# Altium PCB Cube_Brain_PCB.PcbDoc
Units mm, origin at the board's own origin, x right, y up, seen from the top; angles counter-clockwise.
Board outline 34.2 x 34.2 mm, 4 copper layers (Top Layer, Layer 2, Layer 3, Bottom Layer), stack 1.005 mm thick; 92 components, 78 nets, 284 pads, 205 vias.
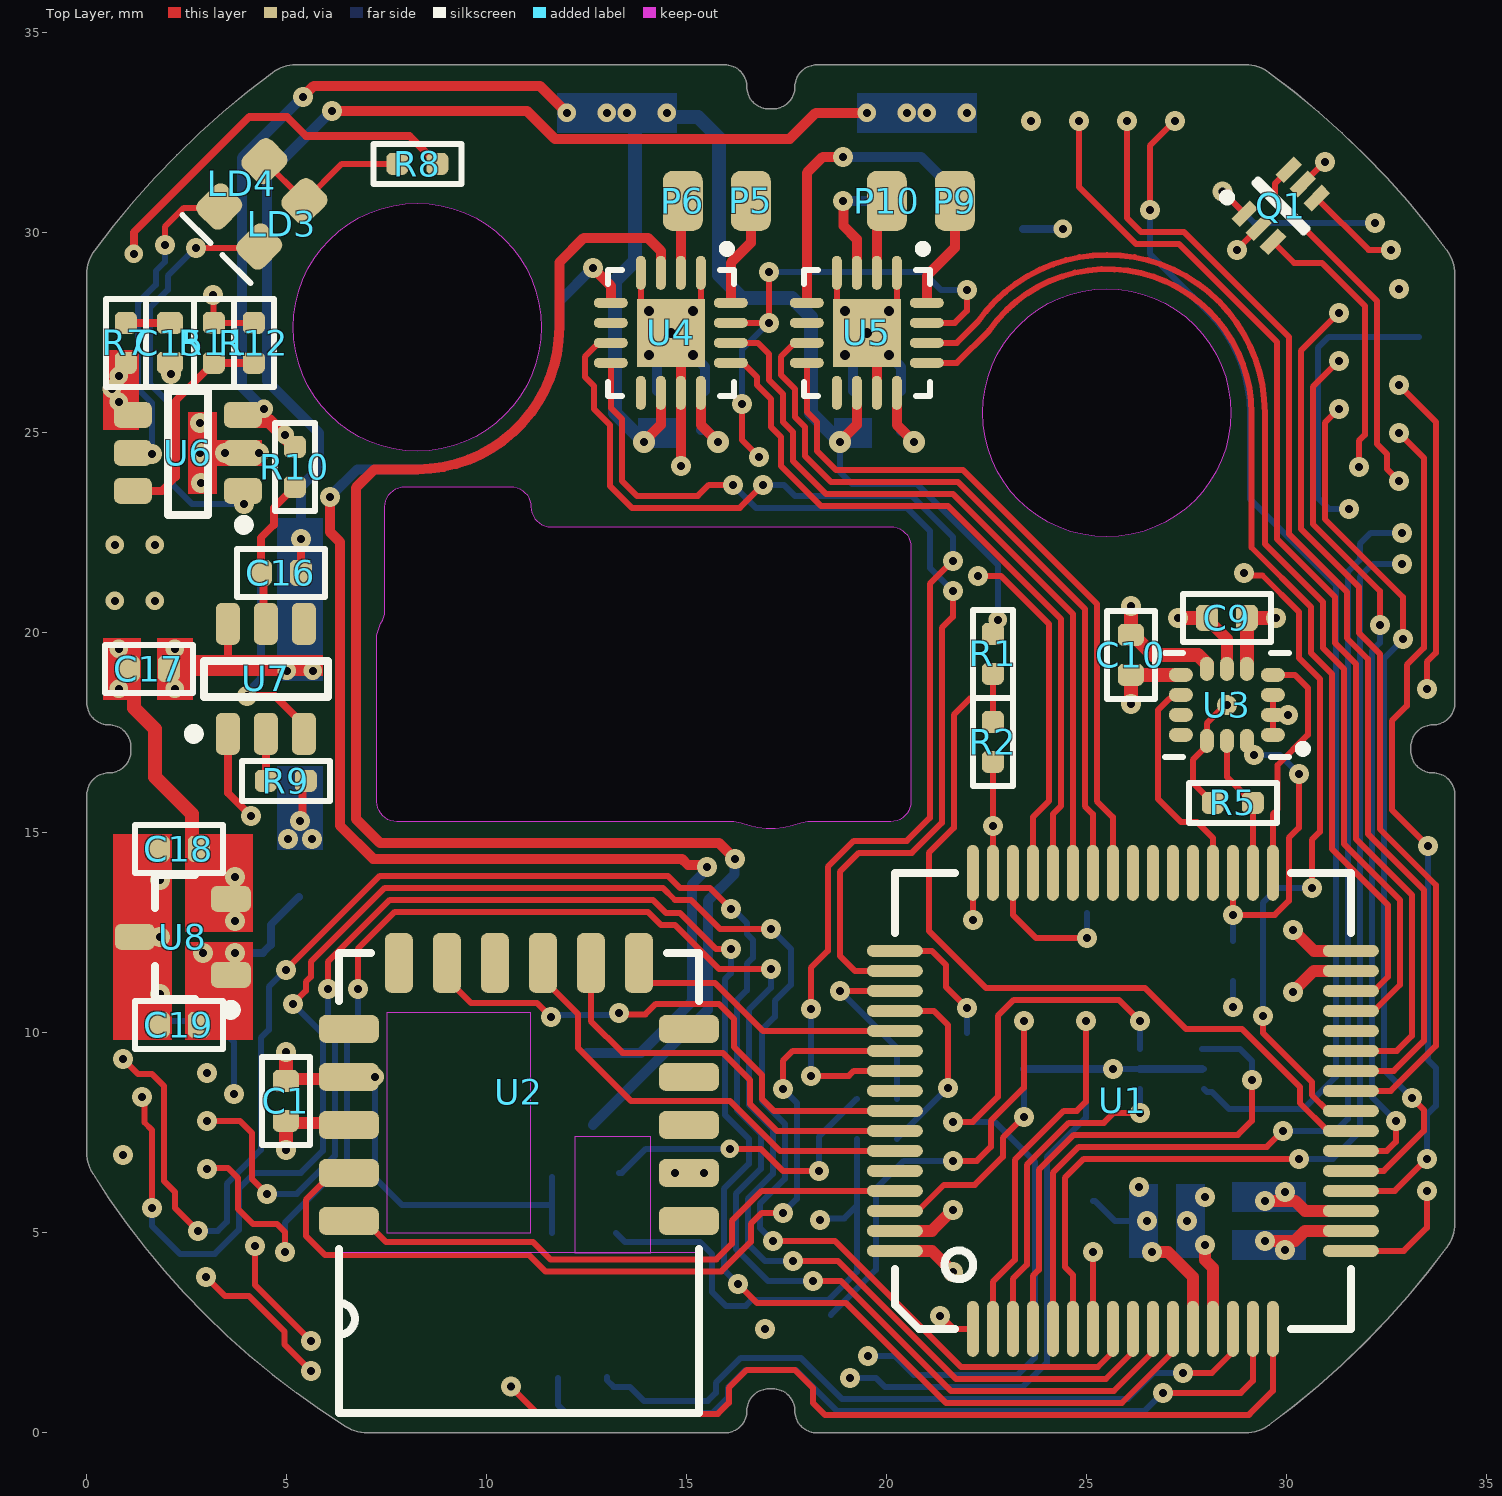
[diagram p0: Top Layer view]
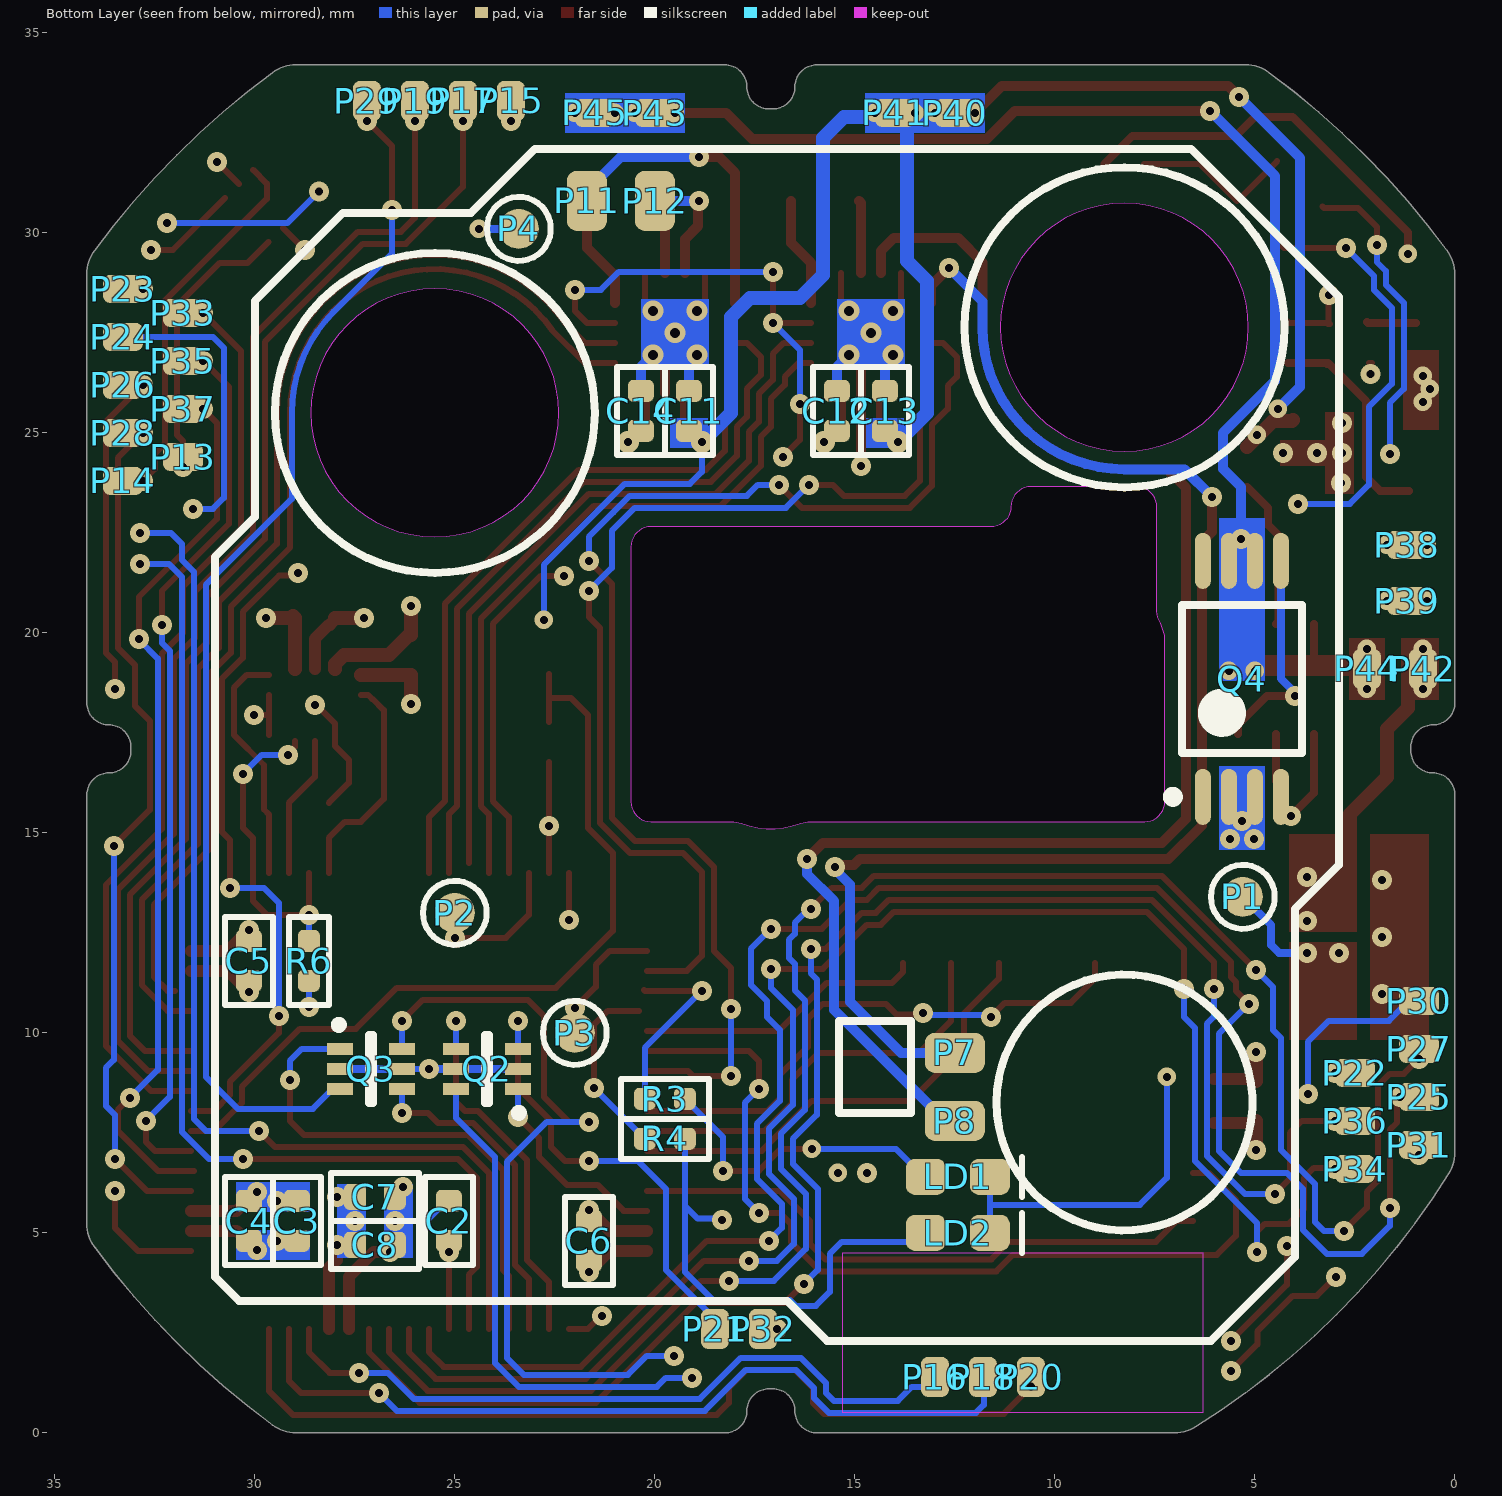
[diagram p1: Bottom Layer view, seen from below]
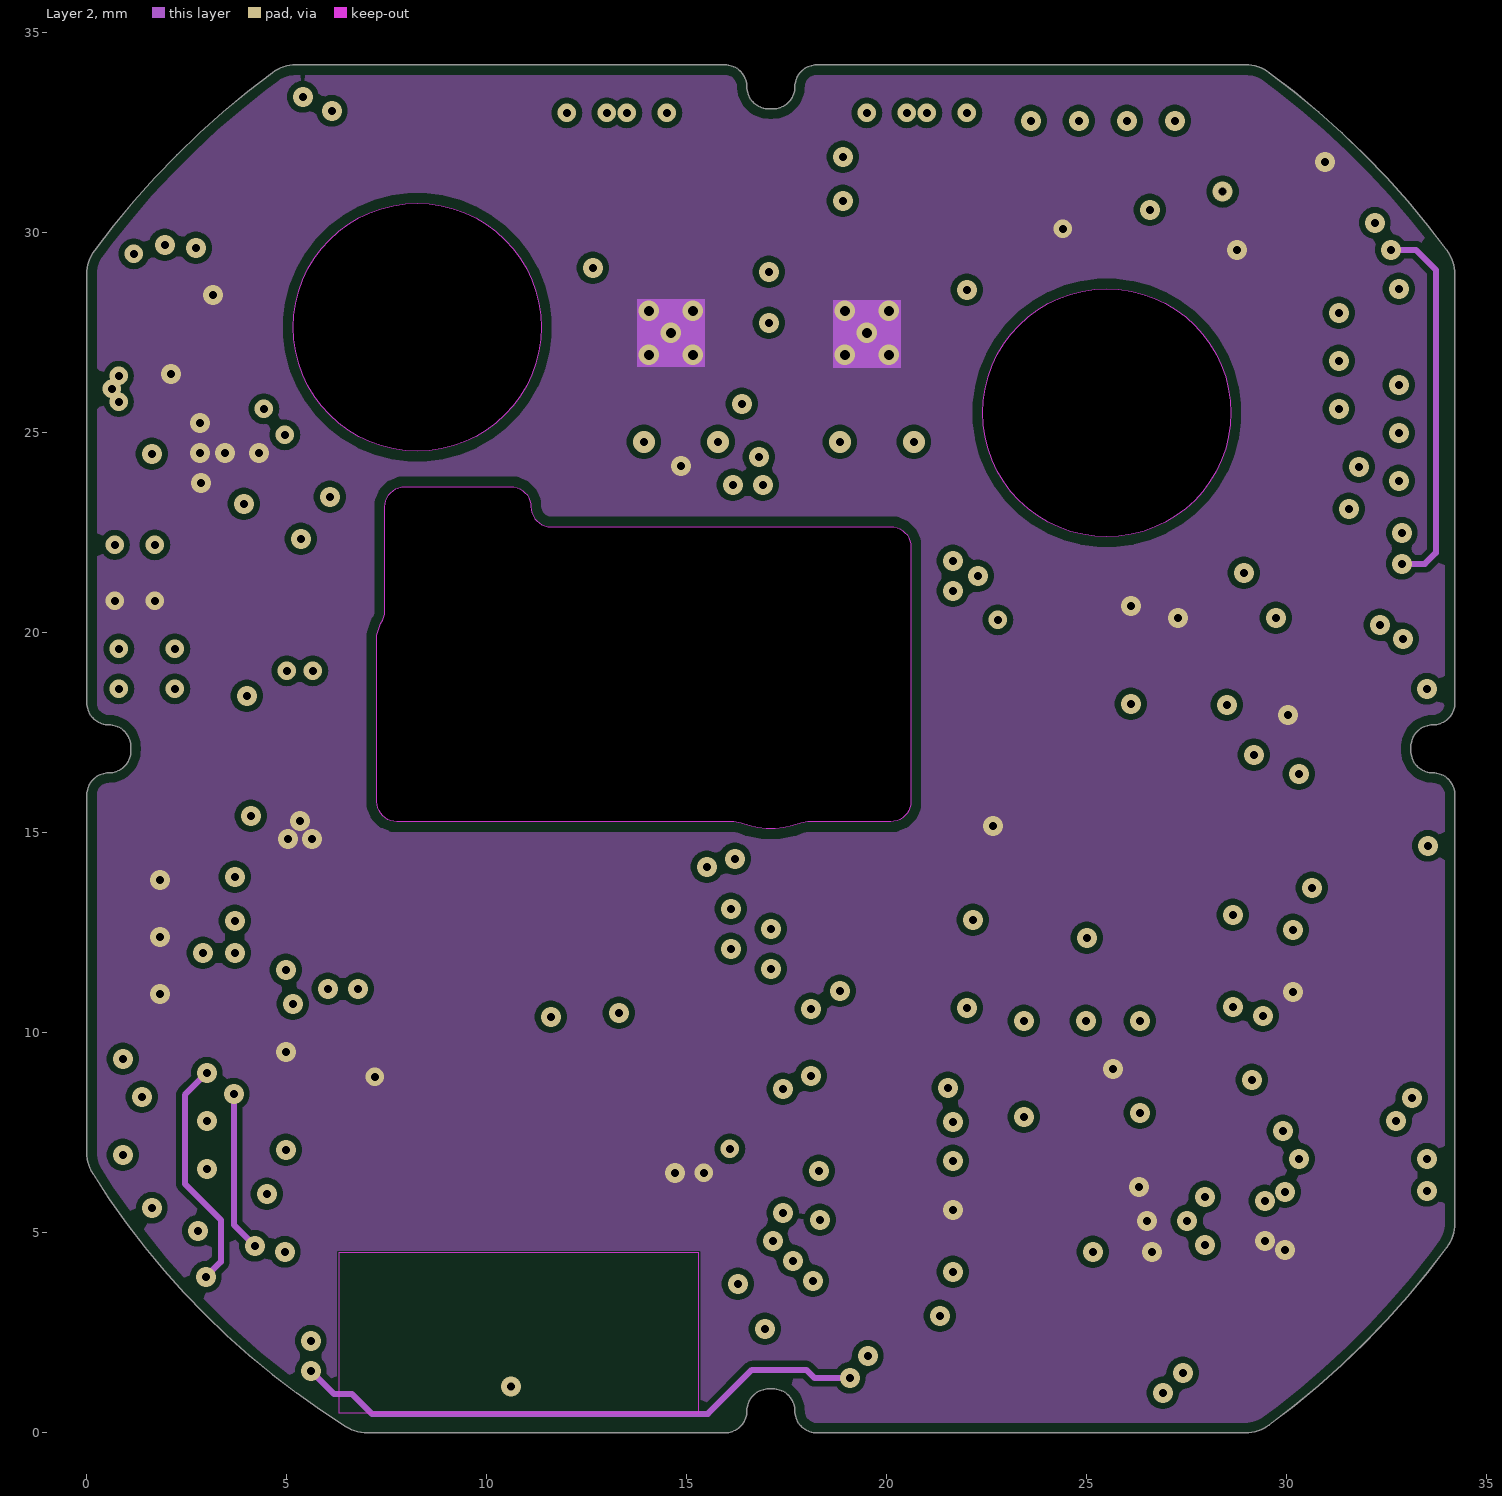
[diagram p2: Layer 2]
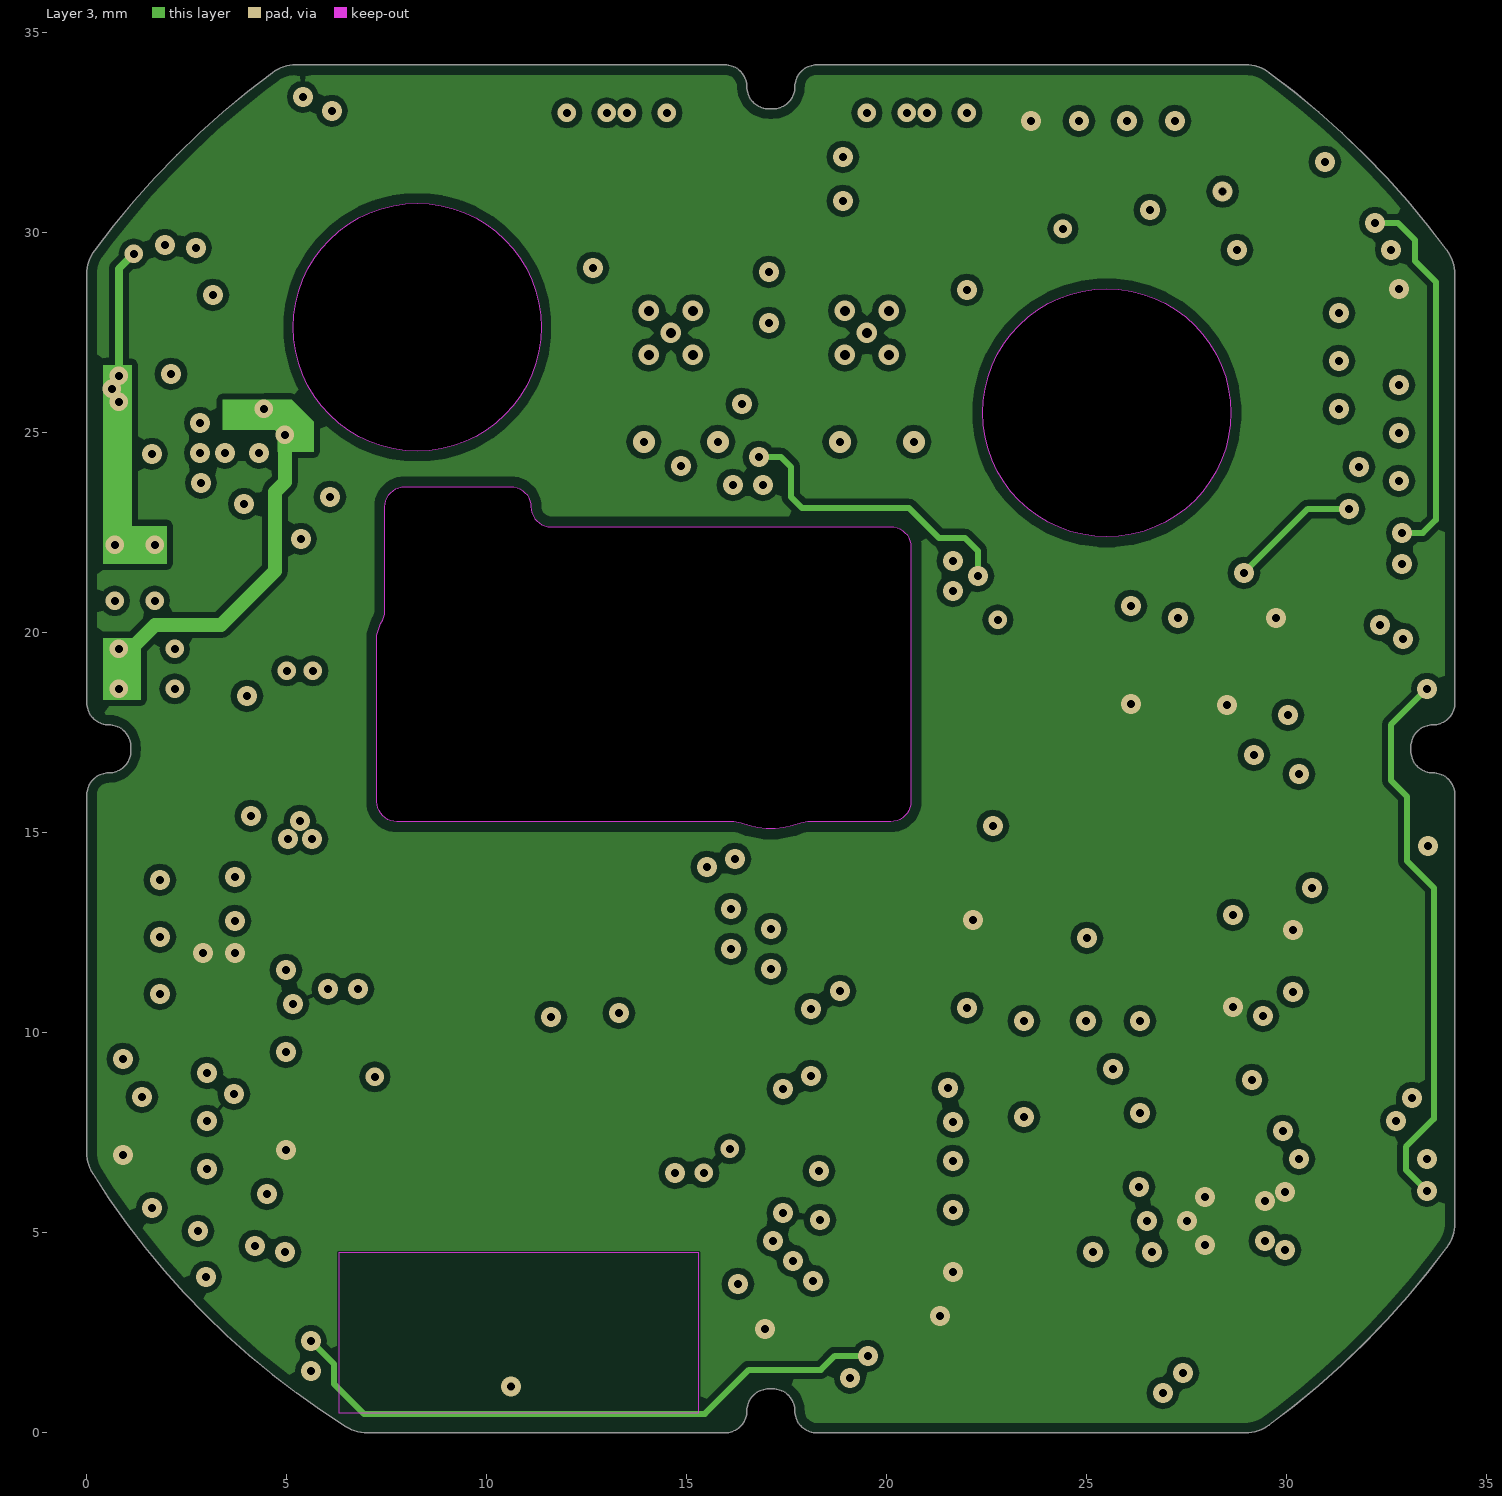
[diagram p3: Layer 3]
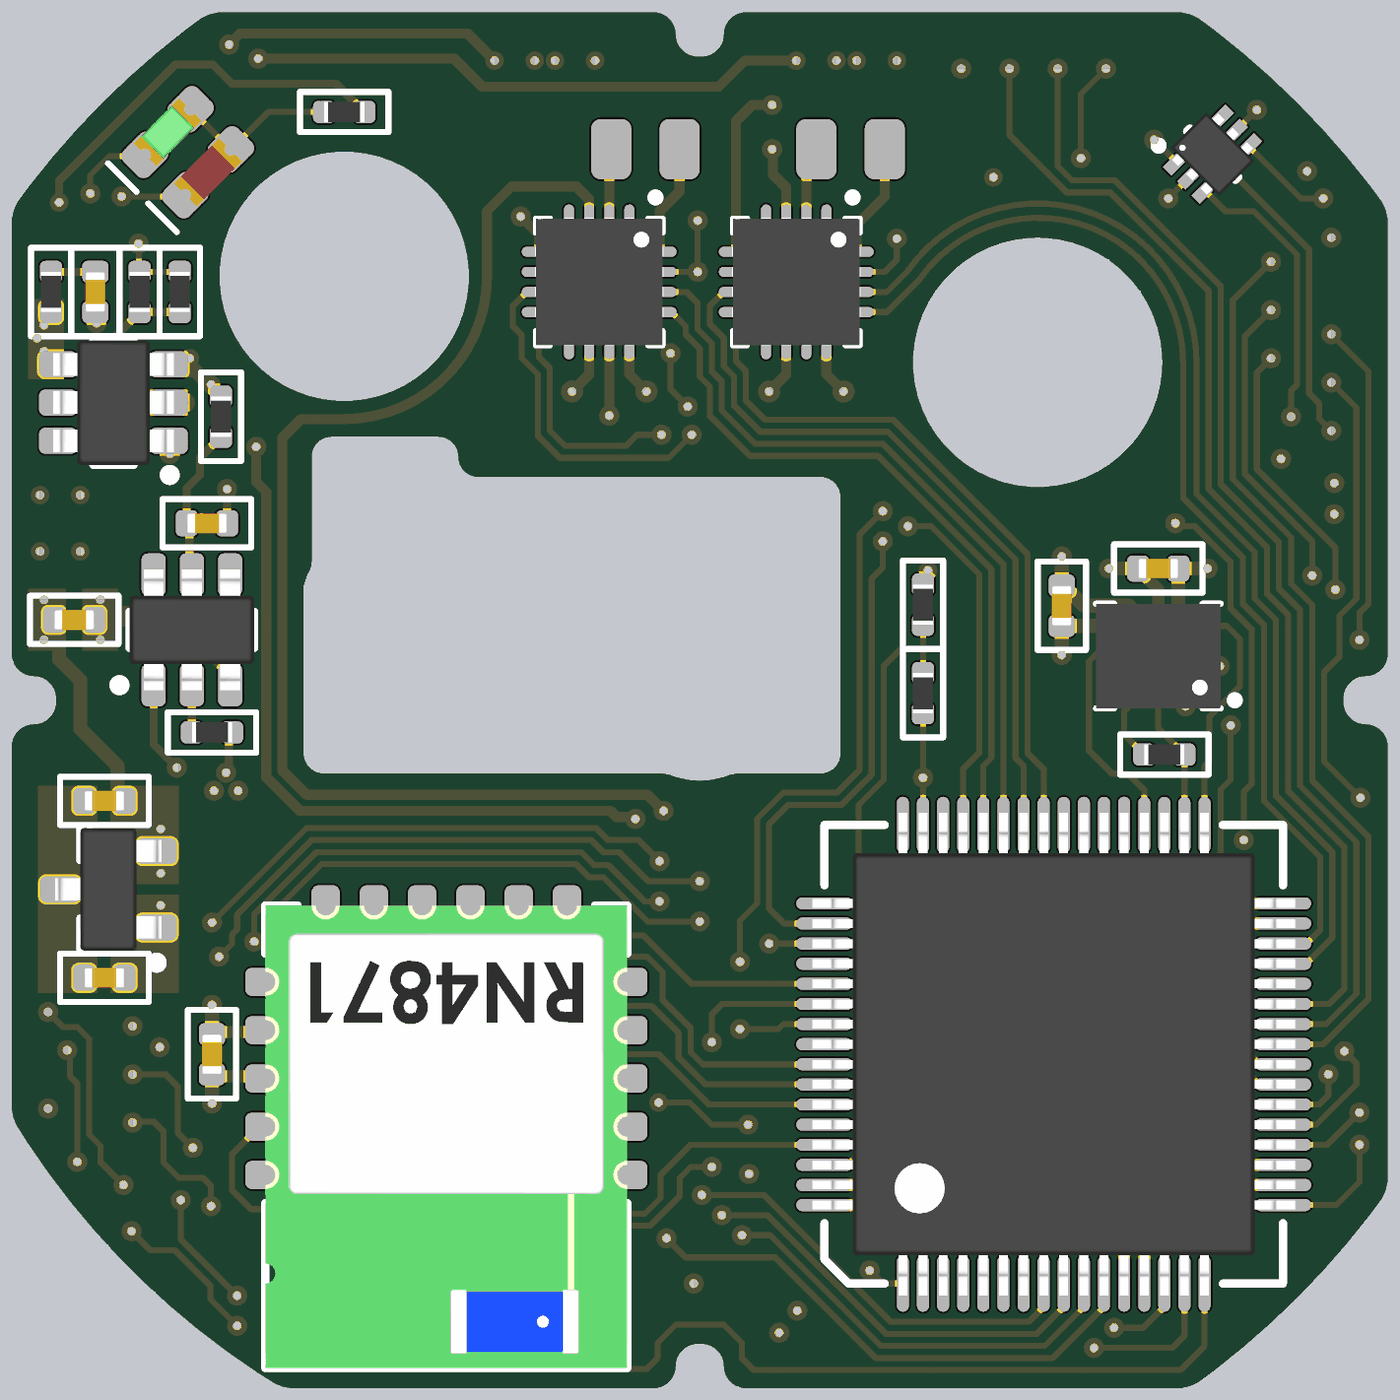
[diagram p4: 3D render of the assembled board from above, using the file's embedded part models]
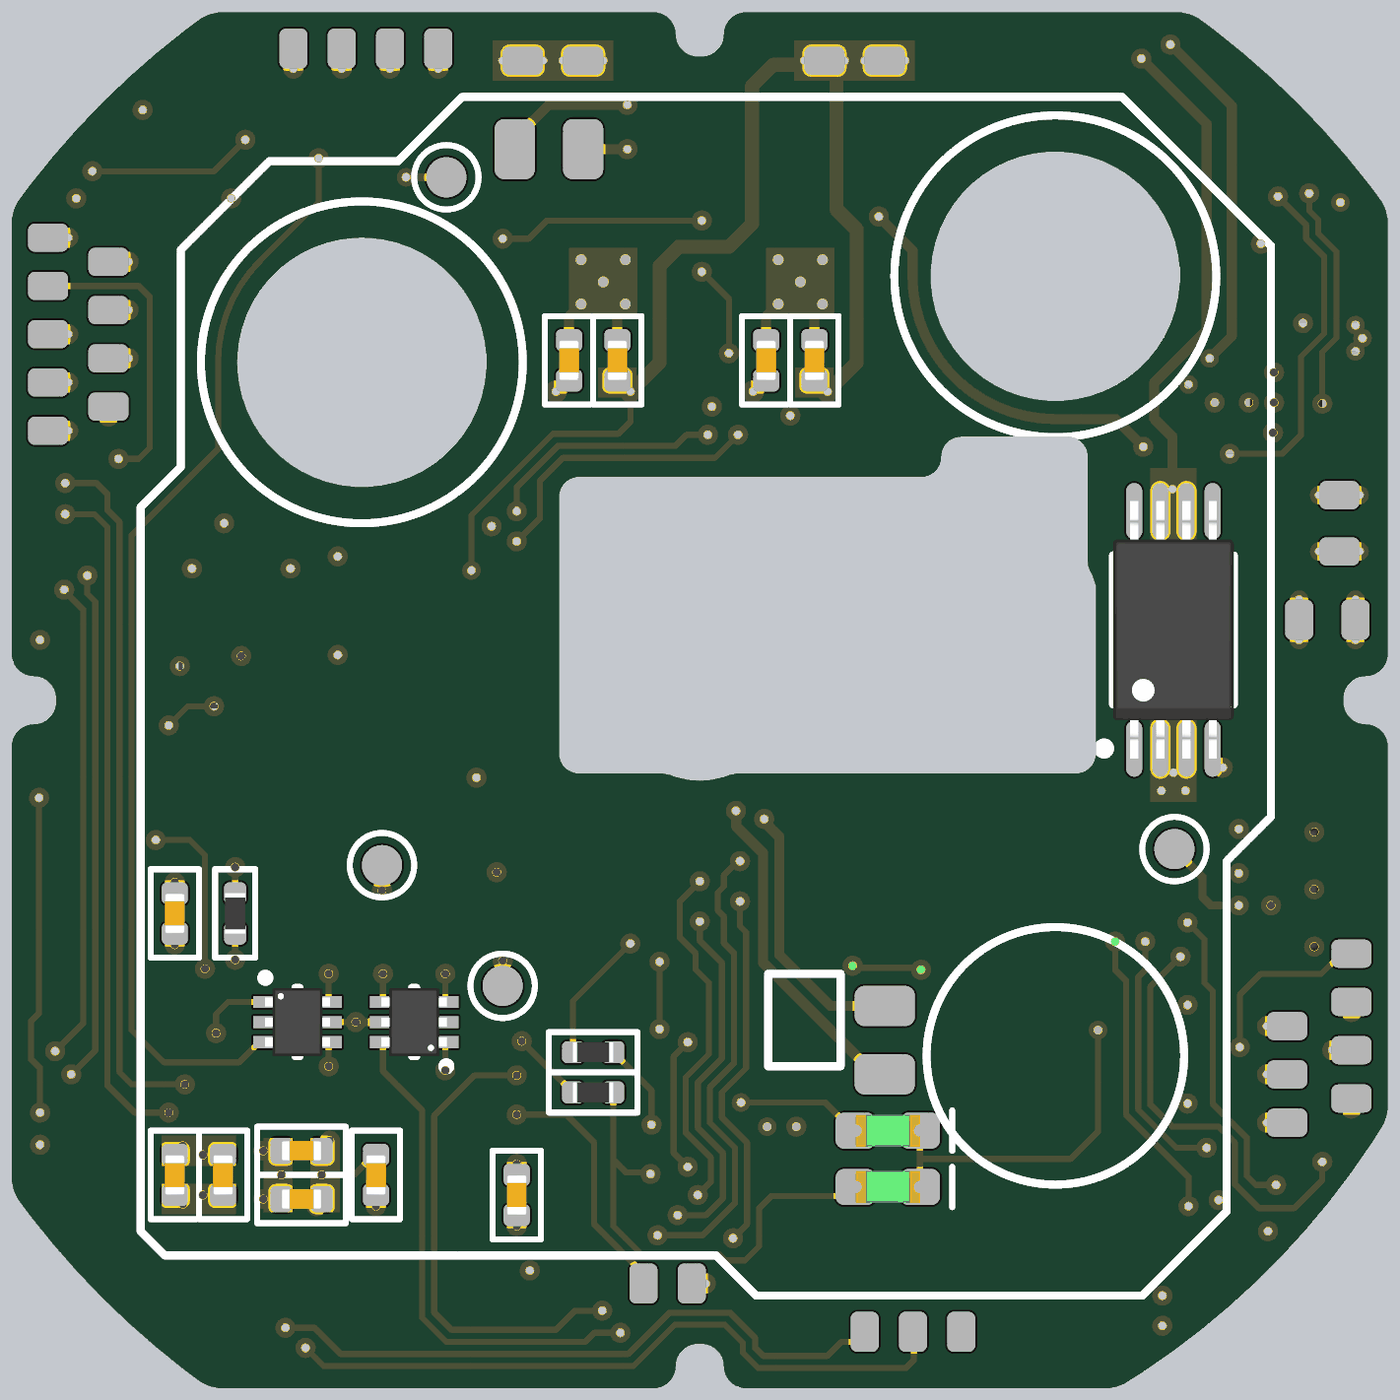
[diagram p5: 3D render of the assembled board from below, using the file's embedded part models]

## Layer stack, top to bottom
Top Solder: solder mask 0.0102, Solder Resist, Dk 3.5
Top Layer: signal copper 0.035
Dielectric 2: prepreg 0.2, PP-006, Dk 4.6
Layer 2: signal copper 0.035
Dielectric 1: dielectric 0.465, FR-4, Dk 4.6
Layer 3: signal copper 0.035
Dielectric 3: prepreg 0.2, PP-006, Dk 4.6
Bottom Layer: signal copper 0.035
Bottom Solder: solder mask 0.0102, Solder Resist, Dk 3.5

## Board outline
0.153,6.48 cw(c1,7.011) 0,7.011 0,15.95 cw(c0.55,15.95) 0.55,16.5 ccw(c0.55,17.05) 1.1,17.05 1.1,17.15 ccw(c0.55,17.15) 0.55,17.7 cw(c0.55,18.25) 0,18.25 0,28.966 cw(c1,28.966) 0.195,29.559 cw(c17.1,17.1) 4.642,34.005 cw(c5.235,33.2) 5.235,34.2 15.95,34.2 cw(c15.95,33.65) 16.5,33.65 ccw(c17.05,33.65) 17.05,33.1 17.15,33.1 ccw(c17.15,33.65) 17.7,33.65 cw(c18.25,33.65) 18.25,34.2 28.966,34.2 cw(c28.966,33.2) 29.559,34.005 cw(c17.1,17.1) 34.005,29.559 cw(c33.2,28.966) 34.2,28.966 34.2,18.25 cw(c33.65,18.25) 33.65,17.7 ccw(c33.65,17.15) 33.1,17.15 33.1,17.05 ccw(c33.65,17.05) 33.65,16.5 cw(c33.65,15.95) 34.2,15.95 34.2,5.235 cw(c33.2,5.235) 34.005,4.641 cw(c17.1,17.1) 29.559,0.195 cw(c28.966,1) 28.966,0 18.25,0 cw(c18.25,0.55) 17.7,0.55 ccw(c17.15,0.55) 17.15,1.1 17.05,1.1 ccw(c17.05,0.55) 16.5,0.55 cw(c15.95,0.55) 15.95,0 7.011,0 cw(c7.011,1) 6.48,0.153 cw(c17.1,17.1)
cut-out: 25.5,22.4 cw(c25.5,25.5) 22.4,25.5 cw(c25.5,25.5) 25.5,28.6 cw(c25.5,25.5) 28.6,25.5 cw(c25.5,25.5)
cut-out: 8.262,24.539 cw(c8.262,27.639) 5.162,27.639 cw(c8.262,27.639) 8.262,30.739 cw(c8.262,27.639) 11.362,27.639 cw(c8.262,27.639)
cut-out: 7.251,15.779 7.251,19.945 7.351,20.245 ccw(c6.951,20.545) 7.451,20.545 7.451,23.152 cw(c7.951,23.152) 7.951,23.652 10.6,23.652 cw(c10.6,23.152) 11.1,23.152 ccw(c11.6,23.152) 11.6,22.652 20.1,22.652 cw(c20.1,22.152) 20.6,22.152 20.6,15.779 cw(c20.1,15.779) 20.1,15.279 18.028,15.279 17.843,15.243 cw(c17.1,17.1) 16.358,15.243 16.172,15.279 7.751,15.279 cw(c7.751,15.779)

## Design rules (kind name [scope] priority, off if disabled: settings)
BoardOutlineClearance [OnTopLayer Or OnBottomLayer Or OnMid] p1: gap=0.25 ignorepadtopadclearanceinfootprint=FALSE
Clearance KeepOut [IsKeepOut] p1: gap=0.05 ignorepadtopadclearanceinfootprint=FALSE
Clearance [Not IsKeepOut vs Not IsKeepOut] p2: gap=0.15 ignorepadtopadclearanceinfootprint=FALSE except(0.254: Arc-Hole Track-Hole SMDPad-Hole THPad-Hole Via-Hole Fill-Hole Poly-Hole Region-Hole Text-Hole)
ComponentClearance [All] p1: gap=0.1 collisioncheckmode=3 verticalgap=0.2 showdistances=TRUE
DiffPairsRouting [All] p1: maxlimit=100 minlimit=0.15 mostfreqgap=0.15 toplayer_minwidth=0.15 toplayer_maxwidth=10 toplayer_prefwidth=0.15 midlayer1_minwidth=0.15 midlayer1_maxwidth=10 midlayer1_prefwidth=0.15 midlayer2_minwidth=0.15 midlayer2_maxwidth=10 midlayer2_prefwidth=0.15 bottomlayer_minwidth=0.15 bottomlayer_maxwidth=10 bottomlayer_prefwidth=0.15 maxuncoupledlength=12.7
Height [All] p1: minheight=0 maxheight=100 prefheight=10
HoleSize [All] p1: absolutevalues=TRUE maxlimit=6.3 minlimit=0.2 maxpercent=80.000 minpercent=20.000
HoleToHoleClearance [All] p1: gap=0.4 allowstackedmicrovias=TRUE
MinimumAnnularRing [All] p1: minimumring=0.13
MinimumSolderMaskSliver [All] p1: minsoldermaskwidth=0
PlaneClearance [All] p1: clearance=0.2
PlaneConnect [All] p1: planeconnectstyle=Direct reliefexpansion=0.3 reliefentries=4 reliefconductorwidth=0.2 reliefairgap=0.2
PolygonConnect [All] p1: connectstyle=Direct reliefconductorwidth=0.2 reliefentries=4 polygonreliefangle="90 Angle" airgapwidth=0.2
RoutingCorners [All] p1: cornerstyle=45-Degree minsetback=2.5 maxsetback=2.5
RoutingVias [All] p1: holewidth=0.2 width=0.45 viastyle="Through Hole" minholewidth=0.2 minwidth=0.45 maxholewidth=6.3 maxwidth=10
SilkToSilkClearance [All] p1: silktosilkclearance=0
SilkToSolderMaskClearance [IsPad] p1: minsilkscreentomaskgap=0 clearancetoexposedcopper=TRUE
SolderMaskExpansion [All] p1: expansion=0.05 istentingtop=FALSE
Width [All] p1: maxlimit=50 minlimit=0.15 preferedwidth=0.15
19 further rules are at their usual default settings.

## Classes and differential pairs
net class SEN_C2: SEN_B2_CTRL SEN_C2_S1 SEN_C2_S2
net class SEN_C1: SEN_C1_CTRL SEN_C1_S1 SEN_C1_S2 SEN_C1_S3
net class SEN_B2: SEN_B2_CTRL SEN_B2_S1 SEN_B2_S2
net class SEN_B1: SEN_B1_CTRL SEN_B1_S1 SEN_B1_S2 SEN_B1_S3
net class SEN_A2: SEN_A2_CTRL SEN_A2_S1 SEN_A2_S2
net class SEN_A1: SEN_A1_S1 SEN_A1_S2 SEN_A1_S3 SEN_A2_CTRL
net class MOTOR_PWM: MOTOR_C1A_PWM MOTOR_C1B_PWM MOTOR_C2A_PWM MOTOR_C2B_PWM MOTOR_C3A_PWM MOTOR_C3B_PWM MOTOR_MA_PWM MOTOR_MB_PWM

## Components (designator, comment, footprint, x,y, rotation, side; value= is the part's Value field where it differs from the comment)
C1 "10uF" CAPC0402X05N 4.975,8.3 r90 top
C2 "100nF" CAPC0402X05N 25.15,5.3 r90 bottom
C3 "10uF" CAPC0402X05N 28.95,5.3 r270 bottom
C4 "100nF" CAPC0402X05N 30.15,5.3 r270 bottom
C5 "100nF" CAPC0402X05N 30.15,11.8 r270 bottom
C6 "100nF" CAPC0402X05N 21.65,4.8 r90 bottom
C7 "1uF" CAPC0402X05N 27,5.9 r180 bottom
C8 "100nF" CAPC0402X05N 27,4.7 r180 bottom
C9 "100nF" CAPC0402X05N 28.5,20.375 r180 top
C10 "100nF" CAPC0402X05N 26.1,19.45 r90 top
C11 "10uF" CAPC0402X05N 19.15,25.55 r270 bottom
C12 "10uF" CAPC0402X05N 15.45,25.55 r90 bottom
C13 "10uF" CAPC0402X05N 14.25,25.55 r270 bottom
C14 "10uF" CAPC0402X05N 20.35,25.55 r90 bottom
C15 "4.7uF" CAPC0402X05N 2.075,27.25 r270 top
C16 "100nF" CAPC0402X05N 4.85,21.5 r0 top
C17 "10uF" CAPC0402X05N 1.55,19.1 r0 top
C18 "4.7uF" CAPC0402X05N 2.3,14.6 r180 top
C19 "4.7uF" CAPC0402X05N 2.3,10.2 r180 top
LD1 "Green" LEDM0603X08N_GREEN 12.425,6.4 r180 bottom
LD2 "Green" LEDM0603X08N_GREEN 12.425,5 r180 bottom
LD3 "Red" LEDM0603X08N_RED 4.875,30.225 r225 top
LD4 "Green" LEDM0603X08N_GREEN 3.875,31.225 r225 top
P1 "PAD_3" PAD_ROUND_1MM 5.3,13.4 r180 bottom
P2 "PAD_3" PAD_ROUND_1MM 25,13 r180 bottom locked
P3 "PAD_3" PAD_ROUND_1MM 22,10 r180 bottom locked
P4 "PAD_3" PAD_ROUND_1MM 23.4,30.1 r180 bottom
P5 "PAD_1" PAD_1.0X1.5MM 16.6,30.8 r90 top
P6 "PAD_1" PAD_1.0X1.5MM 14.9,30.8 r270 top
P7 "PAD_1" PAD_1.0X1.5MM 12.5,9.5 r0 bottom
P8 "PAD_1" PAD_1.0X1.5MM 12.5,7.8 r0 bottom
P9 "PAD_1" PAD_1.0X1.5MM 21.7,30.8 r90 top
P10 "PAD_1" PAD_1.0X1.5MM 20,30.8 r270 top
P11 "PAD_1" PAD_1.0X1.5MM 21.7,30.8 r90 bottom
P12 "PAD_1" PAD_1.0X1.5MM 20,30.8 r90 bottom
P13 "PAD_4" PAD_0.5X1MM 31.8,24.4 r0 bottom
P14 "PAD_4" PAD_0.5X1MM 33.3,23.8 r0 bottom
P15 "PAD_4" PAD_0.5X1MM 23.6,33.3 r90 bottom
P16 "PAD_4" PAD_0.5X1MM 13,1.4 r270 bottom
P17 "PAD_4" PAD_0.5X1MM 24.8,33.3 r90 bottom
P18 "PAD_4" PAD_0.5X1MM 11.8,1.4 r270 bottom
P19 "PAD_4" PAD_0.5X1MM 26,33.3 r90 bottom
P20 "PAD_4" PAD_0.5X1MM 10.6,1.4 r270 bottom
P21 "PAD_4" PAD_0.5X1MM 18.5,2.6 r90 bottom
P22 "PAD_4" PAD_0.5X1MM 2.5,9 r0 bottom
P23 "PAD_4" PAD_0.5X1MM 33.3,28.6 r0 bottom
P24 "PAD_4" PAD_0.5X1MM 33.3,27.4 r0 bottom
P25 "PAD_4" PAD_0.5X1MM 0.9,8.4 r0 bottom
P26 "PAD_4" PAD_0.5X1MM 33.3,26.2 r0 bottom
P27 "PAD_4" PAD_0.5X1MM 0.9,9.6 r0 bottom
P28 "PAD_4" PAD_0.5X1MM 33.3,25 r0 bottom
P29 "PAD_4" PAD_0.5X1MM 27.2,33.3 r90 bottom
P30 "PAD_4" PAD_0.5X1MM 0.9,10.8 r0 bottom
P31 "PAD_4" PAD_0.5X1MM 0.9,7.2 r180 bottom
P32 "PAD_4" PAD_0.5X1MM 17.3,2.6 r270 bottom
P33 "PAD_4" PAD_0.5X1MM 31.8,28 r0 bottom
P34 "PAD_4" PAD_0.5X1MM 2.5,6.6 r0 bottom
P35 "PAD_4" PAD_0.5X1MM 31.8,26.8 r180 bottom
P36 "PAD_4" PAD_0.5X1MM 2.5,7.8 r180 bottom
P37 "PAD_4" PAD_0.5X1MM 31.8,25.6 r0 bottom
P38 "PAD_4" PAD_0.5X1MM 1.2,22.2 r180 bottom
P39 "PAD_4" PAD_0.5X1MM 1.2,20.8 r0 bottom
P40 "PAD_4" PAD_0.5X1MM 12.5,33 r0 bottom
P41 "PAD_4" PAD_0.5X1MM 14,33 r0 bottom
P42 "PAD_4" PAD_0.5X1MM 0.8,19.1 r270 bottom
P43 "PAD_4" PAD_0.5X1MM 20,33 r0 bottom
P44 "PAD_4" PAD_0.5X1MM 2.2,19.1 r90 bottom
P45 "PAD_4" PAD_0.5X1MM 21.5,33 r0 bottom
Q1 "2N7002VA" 2N7002VA 29.85,30.675 r45 top
Q2 "2N7002VA" 2N7002VA 24.2,9.1 r0 bottom
Q3 "2N7002VA" 2N7002VA 27.1,9.1 r180 bottom
Q4 "FS8205A" FS8205A 5.325,18.85 r90 bottom
R1 "12K" RESC0402X04N 22.65,19.475 r90 top
R2 "2.7K" RESC0402X04N 22.65,17.275 r90 top
R3 "330R" RESC0402X04N 19.75,8.35 r180 bottom
R4 "330R" RESC0402X04N 19.75,7.35 r180 bottom
R5 "12K" RESC0402X04N 28.65,15.75 r180 top
R6 "12K" RESC0402X04N 28.65,11.8 r270 bottom
R7 "1R0" RESC0402X04N 0.975,27.25 r270 top
R8 "330R" RESC0402X04N 8.262,31.725 r0 top
R9 "2.7K" RESC0402X04N 4.975,16.3 r180 top
R10 "330R" RESC0402X04N 5.2,24.15 r90 top
R11 "12K" RESC0402X04N 3.175,27.25 r90 top
R12 "12K" RESC0402X04N 4.175,27.25 r90 top
U1 "STM32L412R8T6" STM32L412R 25.9,8.3 r90 top locked
U2 "RN4871" RN4871 15.3,12 r180 top locked
U3 "LSM6DSMTR" LSM6DSMTR 28.5,18.2 r180 top
U4 "DRV8833CRTE" DRV8833CRTER 14.6,27.5 r270 top locked
U5 "DRV8833CRTE" DRV8833CRTER 19.5,27.5 r270 top locked
U6 "SE9017-HF" SE9017-HF 2.525,24.5 r180 top
U7 "AP9101CAK6-ANTRG1" AP9101CAK6 4.475,18.85 r90 top
U8 "MCP1812AT-033/TT" MCP1812AT-033/TT 2.4,12.4 r180 top

## Footprints (in the part's own frame and the unit in brackets; to place one, negate y for a bottom-side part, rotate by r counter-clockwise, add the part's x,y. Pads: shape width x height; smd on the part's side, far side on the other; paste and mask are expansions set on the pad)
2N7002VA [mm] "SOTFL, 6-Leads, Body 1.60x1.63mm, Pitch 0.50mm, IPC Medium Density"
  rect 0.65x0.3 smd: 1(-0.775,0.5) 2(-0.775,0) 3(-0.775,-0.5) 4(0.775,-0.5) 5(0.775,0) 6(0.775,0.5)
  silkscreen extent -0.9,-0.85 0.05,1.2, body extent -0.81,-0.85 0.81,0.85, height 0.6
AP9101CAK6 [mm] "SOT23, 6-Leads, Body 3.00x2.85mm, Pitch 0.95mm, IPC Medium Density"
  rrect50% 1.05x0.6 smd: 1(-1.375,0.95) 2(-1.375,0) 3(-1.375,-0.95) 4(1.375,-0.95) 5(1.375,0) 6(1.375,0.95)
  silkscreen extent -1.5,-1.55 0.45,1.92, body extent -1.5,-1.55 1.5,1.55, height 1.4
CAPC0402X05N [mm] "Chip Capacitor, 2-Leads, Body 1.00x0.50mm, IPC Medium Density"
  rrect50% 0.55x0.65 smd: 1(-0.5,0) 2(0.5,0)
  silkscreen extent -1.1,-0.6 1.1,0.6, body extent -0.5,-0.25 0.5,0.25, height 0.5
DRV8833CRTER [mm] "QFN, 16-Leads, Body 3.00x3.00mm, Pitch 0.50mm, Thermal Pad 1.66x1.66mm, IPC Medium Density"
  oval 0.85x0.25 smd: 1(-1.5,0.75) 2(-1.5,0.25) 3(-1.5,-0.25) 4(-1.5,-0.75) 9(1.5,-0.75) 10(1.5,-0.25) 11(1.5,0.25) 12(1.5,0.75)
  oval 0.25x0.85 smd: 5(-0.75,-1.5) 6(-0.25,-1.5) 7(0.25,-1.5) 8(0.75,-1.5) 13(0.75,1.5) 14(0.25,1.5) 15(-0.25,1.5) 16(-0.75,1.5)
  rect 1.7x1.7 smd: 17(0,0)
  silkscreen extent -2.2,-1.58 1.58,1.58, body extent -1.6,-1.6 1.6,1.6, height 0.8
FS8205A [mm] "TSOP, 8-Leads, Body 2.93x4.40mm, Pitch 0.65mm, IPC Medium Density"
  oval 1.4x0.4 smd: 1(-2.95,0.975) 2(-2.95,0.325) 3(-2.95,-0.325) 4(-2.95,-0.975) 5(2.95,-0.975) 6(2.95,-0.325) 7(2.95,0.325) 8(2.95,0.975)
  silkscreen extent -3.07,-1.5 1.85,1.85, body extent -3.2,-1.5 3.2,1.5, height 1.2
LEDM0603X08N_GREEN [mm] "0603 chip LED"
  rrect50% 1x0.9 smd: 1(-0.8,0) 2(0.8,0)
  silkscreen extent 1.5,-0.53 1.6,0.5, body extent -0.8,-0.4 0.8,0.4, height 0.8
LEDM0603X08N_RED [mm] "0603 chip LED"
  rrect50% 1x0.9 smd: 1(-0.8,0) 2(0.8,0)
  silkscreen extent 1.5,-0.53 1.6,0.5, body extent -0.8,-0.4 0.8,0.4, height 0.8
LSM6DSMTR [mm] "PQFN, 14-Leads, Body 3.00x2.50mm, Pitch 0.50mm, IPC Medium Density"
  oval 0.6x0.35 smd: 1(-1.15,0.75) 2(-1.15,0.25) 3(-1.15,-0.25) 4(-1.15,-0.75) 8(1.15,-0.75) 9(1.15,-0.25) 10(1.15,0.25) 11(1.15,0.75)
  oval 0.35x0.6 smd: 5(-0.5,-0.9) 6(0,-0.9) 7(0.5,-0.9) 12(0.5,0.9) 13(0,0.9) 14(-0.5,0.9)
  silkscreen extent -2,-1.3 1.55,1.3, body extent -1.55,-1.3 1.55,1.3, height 0.86
MCP1812AT-033/TT [mm] "SOT23, 3-Leads, Body 2.00x2.10mm, Pitch 0.65mm, IPC Medium Density"
  rrect50% 1x0.65 smd: 1(-1.2,0.95) 2(-1.2,-0.95) 3(1.2,0)
  silkscreen extent -1.33,-1.55 0.7,1.95, body extent -1.32,-1.52 1.32,1.53, height 1.12
PAD_0.5X1MM [mm]
  rrect50% 1x0.7 smd: 1(0,0)
PAD_1.0X1.5MM [mm]
  rrect50% 1.5x1 smd: 1(0,0)
PAD_ROUND_1MM [mm]
  round 1 smd: 1(0,0)
  silkscreen extent -0.8,-0.8 0.8,0.8
RESC0402X04N [mm] "Chip Resistor, 2-Leads, Body 1.00x0.50mm, IPC Medium Density"
  rrect50% 0.55x0.55 smd: 1(-0.5,0) 2(0.5,0)
  silkscreen extent -1.1,-0.5 1.1,0.5, body extent -0.5,-0.25 0.5,0.25, height 0.35
RN4871 [mm]
  rrect50% 1.5x0.7 smd: 1(0.25,6.7) 2(0.25,5.5) 3(0.25,4.3) 4(0.25,3.1) 5(0.25,1.9) 12(8.75,1.9) 13(8.75,3.1) 14(8.75,4.3) 15(8.75,5.5) 16(8.75,6.7)
  rrect50% 0.7x1.5 smd: 6(1.5,0.25) 7(2.7,0.25) 8(3.9,0.25) 9(5.1,0.25) 10(6.3,0.25) 11(7.5,0.25)
  Top Layer keep-out region: 1.2,4.6 3.1,4.6 3.1,7.5 1.2,7.5
  Top Layer keep-out region: 4.2,1.5 7.8,1.5 7.8,7 4.2,7
  silkscreen extent 0,0 9,11.5, body extent 0,0 9,11.5, height 2.14
SE9017-HF [mm] "SOT23, 6-Leads, Body 2.90x2.80mm, Pitch 0.95mm, IPC Medium Density"
  rrect50% 0.95x0.65 smd: 1(-1.375,0.95) 2(-1.375,0) 3(-1.375,-0.95) 4(1.375,-0.95) 5(1.375,0) 6(1.375,0.95)
  silkscreen extent -1.53,-1.55 0.5,1.92, body extent -1.5,-1.55 1.5,1.55, height 1.3
STM32L412R [mm] "TSQFP, 64-Leads, Body 10.00x10.00mm, Pitch 0.50mm, IPC Medium Density"
  oval 1.4x0.3 smd: 1(-5.7,3.75) 2(-5.7,3.25) 3(-5.7,2.75) 4(-5.7,2.25) 5(-5.7,1.75) 6(-5.7,1.25) 7(-5.7,0.75) 8(-5.7,0.25) 9(-5.7,-0.25) 10(-5.7,-0.75) 11(-5.7,-1.25) 12(-5.7,-1.75) 13(-5.7,-2.25) 14(-5.7,-2.75) 15(-5.7,-3.25) 16(-5.7,-3.75) 33(5.7,-3.75) 34(5.7,-3.25) 35(5.7,-2.75) 36(5.7,-2.25) 37(5.7,-1.75) 38(5.7,-1.25) 39(5.7,-0.75) 40(5.7,-0.25) 41(5.7,0.25) 42(5.7,0.75) 43(5.7,1.25) 44(5.7,1.75) 45(5.7,2.25) 46(5.7,2.75) 47(5.7,3.25) 48(5.7,3.75)
  oval 0.3x1.4 smd: 17(-3.75,-5.7) 18(-3.25,-5.7) 19(-2.75,-5.7) 20(-2.25,-5.7) 21(-1.75,-5.7) 22(-1.25,-5.7) 23(-0.75,-5.7) 24(-0.25,-5.7) 25(0.25,-5.7) 26(0.75,-5.7) 27(1.25,-5.7) 28(1.75,-5.7) 29(2.25,-5.7) 30(2.75,-5.7) 31(3.25,-5.7) 32(3.75,-5.7) 49(3.75,5.7) 50(3.25,5.7) 51(2.75,5.7) 52(2.25,5.7) 53(1.75,5.7) 54(1.25,5.7) 55(0.75,5.7) 56(0.25,5.7) 57(-0.25,5.7) 58(-0.75,5.7) 59(-1.25,5.7) 60(-1.75,5.7) 61(-2.25,5.7) 62(-2.75,5.7) 63(-3.25,5.7) 64(-3.75,5.7)
  silkscreen extent -5.7,-5.7 5.7,5.7, body extent -6,-6 6,6, height 1.6

## Part data
C1 C3 C11 C12 C13 C14 C17: library part "CER 10UF 10V", "CAP CER 10UF 10V X5R 0402", Manufacturer="Murata Electronics", Manufacturer Part Number=GRM155R61A106ME44D, Package / Case=0402, Supplier Part Number 1=C77000, Voltage - Rated=10V, Capacitance=10uF, Category=Capacitors, Supplier 1=LCSC
C2 C4 C5 C6 C8 C9 C10 C16: library part "CER 100NF 16V", "CAP CER 0.1UF 16V X7R 0402", Manufacturer="Samsung Electro-Mechanics", Manufacturer Part Number=CL05B104KO5NNNC, Package / Case=0402, Supplier Part Number 1=C1525, Voltage - Rated=16V, Capacitance=100nF, Category=Capacitors, Supplier 1=LCSC
C7: library part "CER 1UF 16V", "CAP CER 1UF 16V X5R 0402", Manufacturer="Samsung Electro-Mechanics", Manufacturer Part Number=CL05A105KO5NNNC, Package / Case=0402, Supplier Part Number 1=C29266, Voltage - Rated=16V, Capacitance=1uF, Category=Capacitors, Supplier 1=LCSC
C15 C18 C19: library part "CER 4.7UF 10V", "CAP CER 4.7UF 10V X5R 0402", Manufacturer="Samsung Electro-Mechanics", Manufacturer Part Number=CL05A475MP5NRNC, Package / Case=0402, Supplier Part Number 1=C23733, Voltage - Rated=10V, Capacitance=4.7uF, Category=Capacitors, Supplier 1=LCSC
LD1 LD2 LD4: library part "LED 0603 GREEN", "LED GREEN CLEAR CHIP SMD", Manufacturer="Lite-On Inc.", Manufacturer Part Number=LTST-C190KGKT, Package / Case="0603 (1608 Metric)", Supplier Part Number 1=C125094, Category=LED, Color=Green, Supplier 1=LCSC
LD3: library part "LED 0603 RED", "LED RED CLEAR CHIP SMD", Manufacturer="Lite-On Inc.", Manufacturer Part Number=LTST-C190KRKT, Package / Case="0603 (1608 Metric)", Supplier Part Number 1=C94869, Category=LED, Color=Red, Supplier 1=LCSC
P1 P2 P3 P4: "a Round Pad 1mm"
P5 P6 P7 P8 P9 P10 P11 P12: "a Rec Pad, 1.0X1.5mm"
P13 P14 P15 P16 P17 P18 P19 P20 P21 P22 P23 P24 P25 P26 P27 P28 P29 P30 P31 P32 P33 P34 P35 P36 P37 P38 P39 P40 P41 P42 P43 P44 P45: "a Rec pad, 0.5X1mm"
Q1 Q2 Q3: "Mosfet Array 2 N-Channel (Dual) 60V 280mA 150mW Surface Mount SOT-563", Case=SOT-563, Manufacturer="Diodes Incorporated", Manufacturer Part Number=2N7002VA-7-F, Categories=Transistors, Notes=-
Q4: "MOSFET 2N-CH 20V 6A TSSOP8", Case=TSSOP-8, Manufacturer="Fortune Semicon", Supplier Part Number 1=C16052, Category=Transistors, Manufacturer Part Number=FS8205A, Supplier 1=LCSC
R1 R5 R6 R11 R12: library part "RES 12K", "RES SMD 12K OHM 1% 1/16W 0402", Manufacturer=YAGEO, Manufacturer Part Number=RC0402FR-0712KL, Package / Case=0402, Supplier Part Number 1=C114760, Category=Resistors, Resistance=12K, Supplier 1=LCSC
R2 R9: library part "RES 2.7K", "RES SMD 2.7K OHM 1% 1/16W 0402", Manufacturer=YAGEO, Manufacturer Part Number=AC0402FR-072K7L, Package / Case=0402, Supplier Part Number 1=C144771, Category=Resistors, Resistance=2.7K, Supplier 1=LCSC
R3 R4 R8 R10: library part "RES 330R", "RES SMD 330R OHM 1% 1/16W 0402", Manufacturer=YAGEO, Manufacturer Part Number=RC0402FR-07330RL, Package / Case=0402, Supplier Part Number 1=C105875, Category=Resistors, Resistance=330R, Supplier 1=LCSC
R7: library part "RES 1R", "RES SMD 11RK OHM 1% 1/16W 0402", Manufacturer=YAGEO, Manufacturer Part Number=RC0402FR-071RL, Package / Case=0402, Supplier Part Number 1=C185446, Category=Resistors, Resistance=1R0, Supplier 1=LCSC
U1: "ARM® Cortex®-M4 STM32L4 Microcontroller IC 32-Bit 80MHz 64KB (64K x 8) FLASH 64-LQFP (10x10)", Case="64-LQFP (10x10)", Manufacturer=STMicroelectronics, Categories=Microcontrollers, Manufacturer Part Number=STM32L412R8T6, Notes=-
U2: "Bluetooth Bluetooth v5.0 Transceiver Module 2.4GHz Integrated, Chip Surface Mount", Case="16-SMD Module", Manufacturer="Microchip Technology", Manufacturer Part Number=RN4871-I/RM130, Categories="RF Transceiver Modules"
U3: "IMU ACCEL/GYRO I2C/SPI 14LGA", Case="14-VFLGA Module", Manufacturer=STMicroelectronics, Supplier Part Number 1=497-16696-1-ND, Categories="IMUs (Inertial Measurement Units)", Manufacturer Part Number=LSM6DSMTR, Supplier 1=Digi-Key
U4 U5: "Bipolar Motor Driver Power MOSFET PWM 16-WQFN (3x3)", Case="16-WQFN Exposed Pad", Manufacturer="Texas Instruments", Supplier Part Number 1=C154936, Categories="Motor Drivers, Controllers", Manufacturer Part Number=DRV8833CRTE, Supplier 1=LCSC
U6: "IC LI-ION/LI-POLY CTRLR SOT23-6", Case=SOT-23-6, Manufacturer="Seaward Elec", Supplier Part Number 1=C115751, Category="PMIC - Battery Chargers", Manufacturer Part Number=SE9017-HF, Supplier 1=LCSC
U7: "IC BATT PROT LI-ION 1-CELL SOT26", Case=SOT-23-6, Manufacturer="Diodes Incorporated", Supplier Part Number 1=AP9101CAK6-ANTRG1DICT-ND, Category="PMIC - Battery Management", Manufacturer Part Number=AP9101CAK6-ANTRG1, Supplier 1=Digi-Key
U8: "IC REG LINEAR 3.3V 300MA SOT23-3", Case="TO-236-3, SC-59, SOT-23-3", Manufacturer="Microchip Technology", Supplier Part Number 1=MCP1812AT-033/TTCT-ND, Categories="Voltage Regulators - Linear", Manufacturer Part Number=MCP1812AT-033/TT, Supplier 1=Digi-Key

## Via types
v1: diameter 0.5, hole 0.2, Top Layer to Bottom Layer, tented both sides, 162 vias
v2: diameter 0.46, hole 0.2, Top Layer to Bottom Layer, tented both sides, 29 vias
v3: diameter 0.52, hole 0.25, Top Layer to Bottom Layer, tented both sides, 10 vias
v4: diameter 0.55, hole 0.2, Top Layer to Bottom Layer, tented both sides, 4 vias

## Nets (pads, with @x,y where several pads share a name; then routed paths per layer and width w, separated by ;. In a path a pad name is that pad's centre, name@x,y a point inside that pad or via, vN(x,y) a via of type N, cw(c..) or ccw(c..) an arc to the next point about the centre after c; other vN are vias at no path point)
3V3: C1.1 C3.1 C4.1 C5.1 C6.1 C7.1 C8.1 C9.1 C10.1 C19.1 P1.1 P15.1 P23.1 P31.1 P32.1 R5.2 R6.2 U1.1 U1.13 U1.19 U1.32 U1.48 U1.64 U2.14 U3.5 U3.8 U3.12 U8.1 | length 21.8
  Top Layer w0.15: v1(21.325,2.925) 21.347,2.925 21.672,2.6 U1.1 ; v1(22.15,12.825) U1.48 ; R5.2 27.65,16.25 27.65,16.825 28,17.175 U3.12 28,17.738 28.462,18.2 v1(28.5,18.2)
  Top Layer w0.3: C1.1@5.025,7.75 U2.14@6.025,7.75 ; U1.64 21.125,4.55 v1(21.65,4.025) ; v1(27.95,4.7) 27.95,4.325 28.15,4.125 U1.13 ; v1(29.45,5.8) 30.206,5.8 30.456,5.55 U1.19 ; v1(30.15,12.575) 30.675,12.05 U1.32
  Top Layer w0.35: v1(4.975,7.075) C1.1 ; v1(26.1,18.225) C10.1 U3.8 ; U3.5 C9.1 ; C9.1@29.05,20.425 C9.1 ; v1(29.725,20.375) C9.1
  Bottom Layer w0.15: v1@28.65,10.675 R6.2
  Bottom Layer w0.2: v1(3.7,12) 4.4,12 4.6,12.2 4.6,12.7 P1.1
  other v1: 16.95,2.6 27.5,5.3 27.95,5.9 29.95,6.025 0.9,6.95 28.65,10.65 2.9,12 32.8,28.6 23.6,32.8
A1_GND: P21.1 Q2.3 | length 11.1
  Top Layer w0.15: v1(21.65,6.8) 22.25,6.8 22.6,7.15 22.6,7.8 23.425,8.625 v1(23.425,10.3)
  Bottom Layer w0.15: P21.1@18.6,2.95 19.725,4.075 19.725,6.1 20.425,6.8 v1(21.65,6.8) ; Q2.3 v1(23.425,10.3)
A2_GND: P29.1 Q3.3 | length 29.8
  Top Layer w0.15: v1(26.575,30.575) 26.575,32.175 v1(27.2,32.8)
  Bottom Layer w0.15: v1(26.575,30.575) 26.575,29.481 28.028,28.028 cw(c25.5,25.5) 29.075,25.5 29.075,23.35 31.225,21.2 31.225,8.9 30.425,8.1 28.55,8.1 28.125,8.525 28,8.525 Q3.3@27.925,8.6
B1_GND: P14.1 Q1.6 | length 9.2
  Top Layer w0.15: Q1.6 29.7,31.232 29.7,30.85 32.25,28.3 32.25,24.725 32.5,24.475 32.5,24.1 v1(32.8,23.8)
B2_GND: P30.1 Q3.6 | length 46.9
  Top Layer w0.15: v1(4.2,4.675) 4.2,3.7 v1(5.6,2.3) ; v1(21.65,7.775) 22.15,7.775 22.775,8.4 22.775,10.425 23.175,10.825 25.8,10.825 v1(26.325,10.3)
  Layer 2 w0.15: v1(3.675,8.475) 3.675,5.2 v1(4.2,4.675)
  Layer 3 w0.15: v1(5.6,2.3) 6.175,1.725 6.175,1.225 6.925,0.475 15.45,0.475 16.55,1.575 18.35,1.575 18.7,1.925 v1(19.525,1.925)
  Bottom Layer w0.15: P30.1 1.15,10.8 1.65,10.3 3.15,10.3 3.675,9.775 v1@3.675,8.575 ; v1(19.525,1.925) 20.2,1.925 20.675,1.45 23.276,1.45 23.7,1.874 23.7,6.775 22.7,7.775 v1(21.65,7.775) v1@21.625,7.775 ; Q3.6 v1(26.325,10.3)
BATT+: C11.2 C13.2 C17.1 C18.1 P40.1 P41.1 P42.1 R1.2 R10.2 U4.10 U5.10 U6.3 U8.2 | length 60.6
  Top Layer w0.25: v1(5.4,33.4) 5.675,33.675 11.325,33.675 v2(12,33) ; v4(13.925,24.775) 14.35,25.2 U4.10 ; v4(18.825,24.775) 19.25,25.2 U5.10
  Top Layer w0.35: v2(0.8,18.6) 1.075,18.6 1.175,18.5 1.175,18.125 1.7,17.6 1.7,16.4 2.625,15.475 2.625,14.475 C18.1@2.7,14.4 ; U6.3@4.05,25.325 4.075,25.3 4.55,25.3 R10.2
  Layer 3 w0.35: 1.1,19.6 1.7,20.2 3.35,20.2 4.7,21.55 4.7,23.525 4.95,23.775 v2(4.95,24.95)
  Bottom Layer w0.15: v4(18.825,24.775) 18.825,24.025 19.125,23.725 20.75,23.725 22.775,21.7 v2(22.775,20.325)
  Bottom Layer w0.25: v2(4.425,25.6) 3.875,26.15 3.875,31.875 v1(5.4,33.4) ; v4(13.925,24.775) 14.25,25.1 C13.2@14.275,25.1 ; v4(18.825,24.775) 19.1,25.05 C11.2@19.125,25.05
  Bottom Layer w0.35: 13.675,32.625 13.7,32.6 13.7,29.3 13.2,28.8 13.2,25.5 v4(13.925,24.775) ; P41.1@14.35,32.75 14.495,32.895 15.275,32.895 15.8,32.37 15.8,28.95 16.375,28.375 17.625,28.375 18.1,27.9 18.1,25.5 v4(18.825,24.775)
  other v1: 3.7,12.8 3.7,13.9
  other v2: 0.8,19.6 13,33 13.5,33 14.5,33
BATT-: C16.2 C17.2 P43.1 P44.1 P45.1 Q4.6 Q4.7 U7.6 | length 29.1
  Top Layer w0.2: U7.6 3.525,19.4 3.85,19.075 v2@4.825,19.075 ; C16.2 v1(5.35,22.35)
  Top Layer w0.25: v1@6.15,33.05 11,33.05 11.7,32.35 17.575,32.35 18.225,33 v2(19.5,33)
  Bottom Layer w0.25: v1(5.35,22.35) 5.35,23.65 5.8,24.1 5.8,25 4.5,26.3 4.5,31.425 v1(6.125,33.05)
  other v2: 2.2,18.6 5,19.05 5.65,19.05 2.2,19.6 20.5,33 21,33 22,33
BATT_SEN: R1.1 R2.2 U1.23 | length 20.9
  Top Layer w0.15: R2.2 22.65,18.375 ; R1.1 22.65,18.375 ; U1.23 31.02,7.55 30.325,8.245 30.325,8.651 28.876,10.1 27.475,10.1 26.45,11.125 22.475,11.125 21.05,12.55 21.05,14.5 21.675,15.125 21.675,17.95 22.1,18.375 22.65,18.375
BLE_NRST: U1.57 U2.10 | length 14
  Top Layer w0.15: U2.10 9,11.35 9.6,10.75 11.25,10.75 v1@11.575,10.425 ; v1(13.3,10.5) 13.338,10.462 13.962,10.462 14.225,10.725 15.8,10.725 16.175,10.35 16.175,9.65 16.875,8.95 16.875,8.349 17.174,8.05 U1.57
  Bottom Layer w0.15: v1(11.6,10.4) 11.65,10.45 13.25,10.45 v1(13.3,10.5)
BLE_RX_IND: U1.53 U2.6 | length 7.2
  Top Layer w0.15: U2.6 13.8,11.517 14.067,11.25 15.699,11.25 16.899,10.05 U1.53
BLE_SYS_CFG: U1.61 U2.16 | length 15.1
  Top Layer w0.15: U2.16 6.95,5.3 7.475,4.775 11.149,4.775 11.586,4.338 15.738,4.338 16.125,4.725 16.125,5.3 16.875,6.05 U1.61
BLE_TX_IND: U1.54 U2.15 | length 22.4
  Top Layer w0.15: U2.15 6.15,6.5 5.475,5.825 5.475,4.925 5.95,4.45 11.05,4.45 11.462,4.038 15.863,4.038 16.6,4.775 16.6,5.225 16.875,5.5 v1(17.4,5.5) ; v1(17.4,8.6) 17.4,9.3 17.65,9.55 U1.54
  Bottom Layer w0.15: v1(17.4,5.5) 17.75,5.85 17.75,8.25 v1(17.4,8.6)
C1_GND: P13.1 Q1.3 | length 7
  Top Layer w0.15: Q1.3 30.179,29.25 30.875,29.25 31.95,28.175 31.95,24.95 31.8,24.8 v1(31.8,24.15)
C2_GND: P22.1 Q2.6 | length 36.6
  Top Layer w0.15: v1(2.975,3.9) 3.45,3.425 4.051,3.425 4.938,2.538 4.938,2.212 v1(5.6,1.55)
  Layer 2 w0.15: v1(2.975,3.9) 3.35,4.275 3.35,5.325 2.45,6.225 2.45,8.45 v1(3,9) ; v1(5.6,1.55) 6.175,0.975 6.625,0.975 7.125,0.475 15.525,0.475 16.625,1.575 17.99,1.575 18.19,1.375 v1(19.075,1.375)
  Bottom Layer w0.15: v1(19.075,1.375) 19.725,1.375 19.95,1.15 23.4,1.15 24,1.75 24,6.9 24.975,7.875 Q2.6
CHRG: LD3.2 U6.1 | length 10.2
  Top Layer w0.15: LD3.2 4.274,29.624 v1(2.726,29.624) ; v1@2.725,29.625 v1(2.726,29.624)
  Bottom Layer w0.15: v1@2.725,29.6 2.702,29.6 2.025,28.923 2.025,28.575 1.575,28.125 1.575,26.225 2.15,25.65 2.15,23.7 2.625,23.225 v1(3.925,23.225)
CHRGT: LD4.2 U6.5 | length 7.7
  Top Layer w0.15: v1(1.95,29.7) 1.95,30.15 2.424,30.624 3.274,30.624 LD4.2
  Bottom Layer w0.15: v1(1.625,24.475) 1.625,25.751 1.275,26.101 1.275,28.249 1.725,28.699 1.725,29.047 1.95,29.272 v1(1.95,29.7)
CO: Q4.5 U7.3 | length 5.5
  Top Layer w0.2: v1(4,18.425) 4.7,18.425 5.425,17.7 U7.3
  Bottom Layer w0.2: v1(4,18.425) 4,18.503 4.35,18.853 Q4.5 Q4.5@4.35,21.85
DO: Q4.4 U7.1 | length 2.3
  Top Layer w0.2: U7.1 3.525,16 v1(4.1,15.425)
GND: C1.2 C2.2 C3.2 C4.2 C5.2 C6.2 C7.2 C8.2 C9.2 C10.2 C11.1 C12.2 C13.1 C14.2 C15.2 C18.2 C19.2 LD1.2 LD2.2 P4.1 P39.1 Q1.2 Q1.5 Q2.2 Q2.5 Q3.2 Q3.5 Q4.2 Q4.3 R2.1 R9.1 R11.2 R12.2 U1.12 U1.18 U1.31 U1.47 U1.63 U2.2 U2.13 U3.1 U3.2 U3.3 U3.6 U3.7 U4.1 U4.4 U4.11 U4.17 U5.1 U5.4 U5.11 U5.17 U6.2 U8.3 | length 55
  Top Layer w0.15: C15.2 C15.2@2.15,26.75 ; R11.2@3.125,27.725 R11.2@3.175,27.725 ; v1@3.175,28.425 3.163,28.413 3.163,27.762 R11.2 4.15,27.75 R12.2@4.2,27.8 ; v1(5.325,15.3) v1@5.392,15.367 ; R9.1@5.392,16.217 R9.1 ; U4.4 13.85,28.25 v3(14.05,28.05) v3(14.6,27.5) 15.35,28.25 U4.1 ; U4.17@14.85,27.225 U4.17@14.975,27.35 ; U5.4 18.75,28.25 v3(18.95,28.05) v3(19.5,27.5) 20.25,28.25 U5.1 ; U1.47 v1(22.65,15.175) R2.1 ; v1(28.75,29.575) Q1.2 ; U3.1 U3.2 ; U3.3 U3.2 ; v1(30.025,17.95) U3.2 ; Q1.5 v1(30.95,31.775)
  Top Layer w0.2: v1@5.392,15.367 R9.1@5.392,16.217
  Top Layer w0.25: v1(14.85,24.176) U4.11 U4.17@14.85,27.225 ; U5.11 U5.17@19.75,27.05
  Top Layer w0.3: C1.2@5.025,8.85 U2.13@6.025,8.85 ; U1.63 21.125,5.05 v1(21.65,5.575) ; v1(26.625,4.525) 27.025,4.525 27.65,3.9 U1.12 ; C9.2@27.975,20.375 27.975,20.35 28.125,20.2 28.15,20.2 28.5,19.85 U3.6 ; v1(29.45,4.8) 30.206,4.8 30.456,5.05 U1.18 ; v1(30.15,11.025) 30.675,11.55 U1.31
  Top Layer w0.35: C1.2 v1(4.975,9.525) ; v1(26.1,20.675) C10.2 26.15,19.95 26.65,19.45 27.775,19.45 28,19.225 U3.7 ; v1(27.275,20.375) 27.975,20.375 C9.2
  Bottom Layer w0.15: v2(7.2,8.9) 7.2,6.375 7.875,5.7 11.625,5.7 ; LD2.2 11.625,5.7 ; LD1.2 11.625,5.7 ; C2.2 25.2,5.8 25.7,5.3 26.4,5.3 v1@26.425,5.275 ; v1(25.65,9.1) Q3.5@26.3,9.1 ; Q3.2 Q3.2@27.925,9.1
  Bottom Layer w0.2: P4.1 v2(24.4,30.1) ; Q2.2 Q2.5 v1(25.65,9.1) ; Q3.5 Q3.2
  Bottom Layer w0.25: C13.1 14.25,27.05 v3@14.275,27.075 ; v3(15.15,26.95) 15.45,26.65 C12.2 ; v3(18.95,26.95) 19.15,26.75 C11.1 ; v3(20.05,26.95) 20.35,26.65 C14.2
  other v1: 29.95,4.575 26.5,5.3 26.3,6.15 14.7,6.5 1.825,10.975 1.825,12.4 1.825,13.825 5.025,14.85 5.625,14.85 2.85,23.75 2.825,24.5 3.45,24.5 4.3,24.5 2.825,25.25 2.104,26.475 3.15,28.45
  other v2: 15.425,6.5 0.7,20.8 1.7,20.8
  other v3: 14.05,26.95 15.15,28.05 20.05,28.05
I2C2_SCL: R5.1 U1.34 U3.13 | length 3.6
  Top Layer w0.15: U3.13 28.5,16.4 R5.1 U1.34
I2C2_SDA: R6.1 U1.35 U3.14 | length 8.3
  Top Layer w0.15: U1.35 v1(28.65,12.95) 29.7,12.95 30.05,13.3 30.05,14.875 30.3,15.125 v1(30.3,16.475) ; U3.14 29,17.15 v1@29.2,16.95 ; v1(29.176,16.951) v1@29.199,16.951
  Bottom Layer w0.15: R6.1 v1@28.65,12.925 ; v1(29.176,16.951) 29.824,16.951 v1(30.3,16.475)
IMU_INT1: U1.33 U3.4 | length 6
  Top Layer w0.15: U1.33 29.65,15.462 29.771,15.583 29.771,16.696 30.525,17.45 30.525,18.625 30.2,18.95 U3.4
IMU_INT2: U1.36 U3.9 | length 5.6
  Top Layer w0.15: U3.9 27.171,18.45 27.071,18.35 27.059,18.35 26.775,18.066 26.775,15.85 27.35,15.275 27.75,15.275 28.15,14.875 U1.36
LD1: R3.1 U1.51 | length 4.8
  Top Layer w0.15: v1(18.825,11.05) U1.51 20.25,11.05 U1.51@20.275,11.075
  Bottom Layer w0.15: v1(18.825,11.05) 20.25,9.625 R3.1
LD2: R4.1 U1.52 | length 4.6
  Top Layer w0.15: U1.52@20.4,10.55 21.175,10.55 21.525,10.2 v1(21.525,8.625)
  Bottom Layer w0.15: R4.1 v1(21.525,8.625)
LED_CHRG: LD3.1 LD4.1 R8.1 | length 4.2
  Top Layer w0.15: LD4.1 5.406,30.825 LD3.1@5.475,30.825 ; LD3.1 6.375,31.725 R8.1 R8.1@7.775,31.725
MCU_NRST: C2.1 U1.7 | length 1.9
  Top Layer w0.15: U1.7 v1(25.15,4.525)
MOTOR_C1_OUT1: P5.1 U4.16 | length 2.8
  Top Layer w0.25: U4.16 16.1,29.25 16.6,29.75 P5.1
MOTOR_C1_OUT2: P6.1 U4.2 | length 1.8
  Top Layer w0.25: U4.2 14.85,30.75 P6.1
MOTOR_C1A_PWM: U1.43 U4.14 | length 18.8
  Top Layer w0.15: U4.14 16.775,27.25 17.05,26.975 17.05,26.325 17.4,25.975 17.4,25.276 17.65,25.026 17.65,24.301 18.476,23.475 21.65,23.475 24.65,20.475 U1.43@24.65,14.25
MOTOR_C1B_PWM: U1.44 U4.13 | length 18.3
  Top Layer w0.15: U4.13 16.4,26.75 16.75,26.4 16.75,26.2 17.1,25.85 17.1,25.15 17.35,24.9 17.35,24.176 18.351,23.175 21.525,23.175 24.35,20.35 24.35,15.667 24.15,15.467 U1.44
MOTOR_C2_OUT1: P7.1 U4.5 | length 35.5
  Top Layer w0.25: v1(6.075,23.4) 6.075,22.525 6.325,22.275 6.325,15.184 7.159,14.35 7.975,14.35 14.875,14.35 15.027,14.198 15.452,14.198 v1(15.5,14.15) ; v1(12.65,29.125) 13.1,28.675 U4.5
  Bottom Layer w0.25: v1(6.075,23.4) 6.764,24.089 8.262,24.089 ccw(c8.262,27.639) 11.812,27.639 11.812,28.287 v1(12.65,29.125) ; P7.1 13.85,9.5 15.125,10.775 15.125,13.707 15.5,14.082 v1(15.5,14.15)
MOTOR_C2_OUT2: P8.1 U4.3 | length 38.7
  Top Layer w0.25: U4.3 14.35,29.55 14.025,29.875 12.425,29.875 11.812,29.262 11.812,27.639 cw(c8.262,27.639) 8.262,24.089 7.189,24.089 6.725,23.625 6.725,15.35 7.325,14.75 15.8,14.75 v1(16.2,14.35)
  Bottom Layer w0.25: P8.1@12.65,7.7 15.525,10.575 15.525,13.3 16.196,13.971 16.196,14.346 v1(16.2,14.35)
MOTOR_C2A_PWM: U1.55 U4.7 | length 31.7
  Top Layer w0.15: U4.7 12.8,27.25 12.45,26.9 12.45,26.4 12.675,26.175 12.675,25.6 13.075,25.2 13.075,23.676 13.626,23.125 16.325,23.125 v1(16.9,23.7) ; v1(18.1,8.925) 19.05,8.925 19.175,9.05 U1.55 ; v1(18.1,10.6) 18.1,11.625 18.525,12.05 18.525,14.149 19.176,14.8 20.5,14.8 21.075,15.375 21.075,21.225 v1(21.65,21.8)
  Bottom Layer w0.15: v1(16.9,23.7) 17.425,23.7 17.7,23.425 20.624,23.425 21.037,23.012 21.65,22.399 21.65,21.85 v1@21.675,21.825 ; v1(18.1,8.925) v1(18.1,10.6)
MOTOR_C2B_PWM: U1.50 U4.8 | length 25.9
  Top Layer w0.15: U4.8 13.1,25.625 13.375,25.35 13.375,23.8 13.75,23.425 15.275,23.425 15.55,23.7 16.125,23.7 v1@16.15,23.675 ; U1.50 19.2,11.55 18.825,11.925 18.825,14.025 19.3,14.5 20.624,14.5 21.375,15.251 21.375,20.125 21.65,20.4 v1(21.65,21.05)
  Bottom Layer w0.15: v1(16.15,23.7) 16.725,23.125 20.5,23.125 21.075,22.55 21.075,21.625 21.625,21.075 v1@21.625,21.025
MOTOR_C3_OUT1: P9.1 U5.16 | length 2.8
  Top Layer w0.25: U5.16 21,28.925 21.7,29.625 P9.1
MOTOR_C3_OUT2: P10.1 U5.2 | length 1.8
  Top Layer w0.25: U5.2 19.75,30.185 20.165,30.6 P10.1@20.2,30.6
MOTOR_C3A_PWM: U1.29 U5.14 | length 28.7
  Top Layer w0.15: U5.14 21.749,27.25 22.264,27.766 cw(c25.5,25.5) 29.45,25.5 29.45,22.225 30.9,20.775 30.9,19.624 31.425,19.099 31.425,14.724 32.825,13.324 32.825,11.195 32.18,10.55 U1.29
MOTOR_C3B_PWM: U1.30 U5.13 | length 27.2
  Top Layer w0.15: U5.13 21.753,26.75 22.56,27.557 cw(c25.513,25.489) 28.062,28.038 cw(c25.513,25.489) 29.118,25.489 29.118,22.132 30.6,20.65 30.6,19.499 31.125,18.974 31.125,14.6 32.525,13.2 32.525,11.395 32.18,11.05 U1.30@32,11.05
MOTOR_MA_OUT1: P11.1 U5.5 | length 7.4
  Top Layer w0.25: U5.5 18,31.5 18.4,31.9 v1(18.9,31.9)
  Bottom Layer w0.25: v1(18.9,31.9) 20.85,31.9 21.6,31.15 P11.1@21.6,31.1
MOTOR_MA_PWM: U1.42 U5.7 | length 18.8
  Top Layer w0.15: U5.7 17.7,27.25 17.35,26.9 17.35,26.449 17.7,26.099 17.7,25.4 17.95,25.15 17.95,24.425 18.6,23.775 21.774,23.775 24.95,20.599 24.95,15.667 25.15,15.467 U1.42
MOTOR_MB_OUT2: P12.1 U5.3 | length 3
  Top Layer w0.25: v1(18.9,30.8) 18.916,30.784 18.916,30.175 19.25,29.841 U5.3
  Bottom Layer w0.25: v1(18.9,30.8) P12.1
MOTOR_MB_PWM: U1.41 U5.8 | length 17.8
  Top Layer w0.15: U5.8 18,25.525 18.25,25.275 18.25,24.55 18.725,24.075 21.899,24.075 25.25,20.724 25.25,15.791 25.65,15.391 U1.41
MOTOR_NSLEEP: U1.45 U4.15 U5.15 | length 28.9
  Top Layer w0.15: U4.15 v1(17.05,27.75) v1@17.05,28.975 ; v1(16.375,25.725) 16.375,24.825 v1@16.775,24.425 ; U5.15 21.7,27.75 22,28.05 v1(22,28.575) ; v1(22.275,21.425) 22.851,21.425 24.05,20.226 24.05,15.791 23.65,15.391 U1.45
  Layer 3 w0.15: v1(16.8,24.4) 17.35,24.4 17.6,24.15 17.6,23.4 17.875,23.125 20.55,23.125 21.3,22.375 21.95,22.375 22.275,22.05 v1(22.275,21.425)
  Bottom Layer w0.15: v1(16.375,25.725) 16.375,27.075 v1(17.05,27.75) ; v1@17.025,29.025 v1(17.05,29.025) 20.9,29.025 21.35,28.575 v1(22,28.575)
NetC15_1: C15.1 R7.1 | length 1.2
  Top Layer w0.2: R7.1 C15.1 2.175,27.75 C15.1@2.2,27.775
R_LD1: LD1.1 R3.2 | length 7.7
  Top Layer w0.15: v2@16.1,7.125 16.125,7.1 16.85,7.1 17.4,6.55 v1(18.3,6.55)
  Bottom Layer w0.15: LD1.1@13.3,6.5 13.375,6.5 13.975,7.1 v2(16.075,7.1) ; v1(18.3,6.55) 18.3,7.4 R3.2
R_LD2: LD2.1 R4.2 | length 12.1
  Bottom Layer w0.15: LD2.1 13.45,4.775 15.325,4.775 15.625,4.475 15.625,3.525 15.975,3.175 16.475,3.175 16.625,3.325 18.551,3.325 19.25,4.024 19.25,5.675 ; v1(18.325,5.325) 18.361,5.361 18.936,5.361 19.25,5.675 ; R4.2 19.25,5.675
R_PROG: R11.1 R12.1 U6.6 | length 5.4
  Top Layer w0.2: U6.6 1.875,23.55 2.225,23.9 2.225,25.8 R11.1 ; R11.1@3.2,26.725 3.225,26.75 R12.1
SEN_A1_CTRL: Q2.4 U1.2 | length 9.6
  Top Layer w0.15: U1.2 22.65,3.774 23.2,4.324 23.2,6.823 24.427,8.05 24.75,8.05 24.975,8.275 v1(24.975,10.3)
  Bottom Layer w0.15: Q2.4 v1(24.975,10.3)
SEN_A1_S1: P16.1 U1.14 | length 18
  Top Layer w0.15: v1(27.4,1.5) 28.13,1.5 28.65,2.02 U1.14
  Bottom Layer w0.15: P16.1 13,1.321 13.171,1.15 13.575,1.15 13.925,0.8 15.525,0.8 15.725,1 15.725,1.25 16.35,1.875 17.849,1.875 18.874,0.85 26.025,0.85 26.675,1.5 v1(27.4,1.5)
SEN_A1_S2: P18.1 U1.15 | length 20.8
  Top Layer w0.15: v1(26.9,1) 28.85,1 29.15,1.3 U1.15
  Bottom Layer w0.15: P18.1@11.775,1.375 11.775,0.7 11.975,0.5 15.65,0.5 16.025,0.875 16.025,1.125 16.475,1.575 17.725,1.575 18.75,0.55 26.45,0.55 v1(26.9,1)
SEN_A1_S3: P20.1 U1.16 | length 22.5
  Top Layer w0.15: v1(10.6,1.154) 10.6,1.15 11.275,0.475 15.775,0.475 16.05,0.75 16.05,1.125 16.5,1.575 17.7,1.575 18.15,1.125 18.15,0.75 18.45,0.45 29.05,0.45 ; 29.075,0.475 29.65,1.05 U1.16
SEN_A2_CTRL: Q3.4 U1.3 | length 8.2
  Top Layer w0.15: U1.3 23.15,3.849 23.5,4.199 23.5,6.699 24.551,7.75 25.425,7.75 25.675,8 v1(26.325,8)
  Bottom Layer w0.15: v1(26.325,8) Q3.4
SEN_A2_S1: P17.1 U1.27 | length 28.6
  Top Layer w0.15: v1(24.8,32.8) 24.8,31.15 26.225,29.725 27.3,29.725 29.75,27.275 29.75,22.349 31.2,20.899 31.2,19.748 31.725,19.223 31.725,14.849 33.125,13.449 33.125,9.925 32.75,9.55 U1.27
SEN_A2_S2: P19.1 U1.26 | length 28.8
  Top Layer w0.15: v1(26,32.8) 26,30.374 26.349,30.025 27.424,30.025 30.05,27.399 30.05,22.474 31.5,21.024 31.5,19.872 32.025,19.347 32.025,14.973 33.425,13.573 33.425,9.801 33.375,9.751 32.675,9.05 U1.26
SEN_B1_CTRL: Q1.1 U1.5 | length 41.8
  Top Layer w0.15: U1.5 24.15,6.5 24.8,7.15 29.5,7.15 v1(29.9,7.55) ; v1(28.396,31.033) Q1.1
  Layer 3 w0.15: v1(32.2,30.25) 32.775,30.25 33.2,29.825 33.2,29.3 33.725,28.775 33.725,22.825 33.4,22.5 v1(32.875,22.5)
  Bottom Layer w0.15: v1@28.375,31.025 28.404,31.025 29.179,30.25 v1(32.2,30.25) ; v1(29.9,7.55) 31.226,7.55 31.525,7.849 31.525,21.525 31.825,21.825 31.825,22.225 32.1,22.5 v1@32.85,22.5
SEN_B1_S1: P24.1 U1.24 | length 27.4
  Top Layer w0.15: v1(28.925,21.5) 28.992,21.433 29.393,21.433 30.3,20.526 30.3,19.375 30.825,18.85 30.825,15.025 30.625,14.825 v1(30.625,13.625) ; v1@29.45,10.4 29.4,10.35 29.4,10 30.625,8.775 30.625,8.445 31.02,8.05 U1.24
  Layer 3 w0.15: v1(28.925,21.5) 30.525,23.1 v1(31.55,23.1) v1@31.575,23.1
  Bottom Layer w0.15: v1(29.4,10.425) 29.4,13.25 29.775,13.625 v1(30.625,13.625) ; v1(31.55,23.1) 31.05,23.1 30.775,23.375 30.775,27.125 31.05,27.4 P24.1@33.304,27.4
SEN_B1_S2: P26.1 U1.17 | length 25
  Top Layer w0.15: U1.17 32.925,4.55 33.5,5.125 v1(33.5,6.05) ; v1(32.8,26.2) 33.725,25.275 33.725,19.5 33.5,19.275 v1(33.5,18.6)
  Layer 3 w0.15: v1(33.5,6.05) 32.975,6.575 32.975,7.15 33.675,7.85 33.675,13.625 33,14.3 33,15.913 32.6,16.312 32.6,17.7 v1(33.5,18.6)
SEN_B1_S3: P28.1 U1.20 | length 21.5
  Top Layer w0.15: U1.20 32.7,6.05 v1(33.5,6.85) ; v1(32.8,25) 33.425,24.375 33.425,19.625 33,19.2 33,18.175 32.625,17.8 32.625,15.575 v1(33.525,14.675)
  Bottom Layer w0.15: v1(33.5,6.85) 33.5,7.95 33.725,8.175 33.725,9.125 33.525,9.325 v1(33.525,14.675)
SEN_B2_CTRL: Q3.1 U1.4 | length 12.7
  Top Layer w0.15: U1.4 23.65,3.925 23.8,4.075 23.8,6.574 24.676,7.45 28.775,7.45 29.125,7.8 v1(29.125,8.825)
  Bottom Layer w0.15: Q3.1 28.825,9.6 29.125,9.3 v1(29.125,8.825)
SEN_B2_S1: P25.1 U1.8 | length 47
  Top Layer w0.15: v1(1.375,8.4) 1.442,8.333 1.442,7.758 1.625,7.575 v1(1.625,5.625) ; v1(5.15,10.725) 5.475,11.05 5.475,11.275 5.6,11.4 5.6,11.775 7.45,13.625 14.4,13.625 14.692,13.333 ; 14.693,13.333 14.701,13.325 15.1,13.325 15.825,12.6 v1(17.1,12.6) ; v1(17.15,4.8) 18.7,4.8 21.85,1.65 25.28,1.65 25.65,2.02 U1.8
  Bottom Layer w0.15: v1(1.625,5.625) 1.625,5.175 2.325,4.475 3.2,4.475 3.8,5.075 3.8,6.1 4.2,6.5 5.351,6.5 5.9,7.049 5.9,9.975 v1(5.15,10.725) ; v1(17.1,12.6) 17.6,12.1 17.6,11.2 17.2,10.8 17.2,10.4 16.875,10.075 16.875,8.3 17.45,7.725 17.45,6.35 16.825,5.725 16.825,5.125 v1(17.15,4.8)
SEN_B2_S2: P27.1 U1.10 | length 47.8
  Top Layer w0.15: v1(0.9,9.35) 1.275,8.975 1.625,8.975 1.925,8.675 1.925,6.3 2.2,6.025 2.2,5.625 v1(2.775,5.05) ; v1(4.975,11.575) 7.326,13.925 14.525,13.925 14.825,13.625 15.575,13.625 v1(16.1,13.1) ; v1(18.15,3.8) 18.85,3.8 21.6,1.05 25.68,1.05 26.65,2.02 U1.10
  Bottom Layer w0.15: v1(2.775,5.05) 3.275,5.05 3.5,5.275 3.5,6.225 4.35,7.075 4.35,9.875 4.55,10.075 4.55,11.15 v1(4.975,11.575) ; v1(16.1,13.1) 16.15,13.1 16.5,12.75 16.5,12.475 16.65,12.325 16.65,11.875 16.5,11.725 16.5,11.065 16.25,10.815 16.25,8.075 16.85,7.475 16.85,6.599 16.225,5.974 16.225,4.6 17.025,3.8 v1(18.15,3.8)
SEN_C1_CTRL: Q1.4 U1.6 | length 38.5
  Top Layer w0.15: U1.6 24.65,3.675 24.65,3.95 24.45,4.15 24.45,6.375 24.925,6.85 v1(30.3,6.85) ; Q1.4 32.046,29.575 v1(32.6,29.575)
  Layer 2 w0.15: v1(32.6,29.575) 33.225,29.575 33.725,29.075 33.725,22 33.45,21.725 v1(32.875,21.725)
  Bottom Layer w0.15: v1(30.3,6.85) 31.15,6.85 31.825,7.525 31.825,21.4 32.15,21.725 v1(32.875,21.725)
SEN_C1_S1: P33.1 U1.25 | length 22.7
  Top Layer w0.15: v1(31.3,28) 30.35,27.05 30.35,22.598 31.8,21.148 31.8,19.999 32.325,19.474 32.325,15.097 33.725,13.697 33.725,9.676 32.599,8.55 U1.25
SEN_C1_S2: P35.1 U1.22 | length 22
  Top Layer w0.15: v1(31.3,26.8) 30.65,26.15 30.65,22.722 32.325,21.047 v1(32.325,20.2) ; U1.22 32.5,7.05 32.725,7.275 v1(32.725,7.8)
  Bottom Layer w0.15: v1(32.325,20.2) 32.325,19.75 32.125,19.55 32.125,8.4 v1(32.725,7.8)
SEN_C1_S3: P37.1 U1.21 | length 21.8
  Top Layer w0.15: v1(31.3,25.6) 30.95,25.25 30.95,22.846 32.9,20.896 v1@32.9,19.925 ; U1.21@31.525,6.55 32.425,6.55 33.425,7.55 33.425,8.075 v1(33.125,8.375)
  Bottom Layer w0.15: v1@32.9,19.825 32.897,19.825 32.425,19.353 32.425,9.075 v1(33.125,8.375)
  other v1: 32.9,19.85
SEN_C2_CTRL: Q2.1 U1.62 | length 5.2
  Top Layer w0.15: U1.62 20.78,5.55 21.43,6.2 22.2,6.2 22.9,6.9 22.9,7.375 v1(23.425,7.9)
  Bottom Layer w0.15: v1(23.425,7.9) Q2.1
SEN_C2_S1: P34.1 U1.9 | length 42.7
  Top Layer w0.15: v1(3,6.6) 3.025,6.625 3.525,6.625 3.775,6.375 3.775,5.6 4.15,5.225 4.75,5.225 4.95,5.025 v1@4.95,4.55 ; v1(6.775,11.1) 6.775,12.1 7.7,13.025 14.026,13.025 14.351,12.7 14.701,12.7 15.575,11.826 15.8,11.6 v1(17.1,11.6) ; v1(17.65,4.3) 18.776,4.3 19.4,3.676 21.726,1.35 25.48,1.35 26.15,2.02 U1.9
  Bottom Layer w0.15: v1(4.95,4.525) 4.95,5.25 6.5,6.8 6.5,10.125 6.775,10.4 v1(6.775,11.1) ; v1(17.1,11.6) 17.1,11.124 16.55,10.574 16.55,8.201 17.15,7.601 17.15,6.475 16.525,5.85 16.525,4.725 16.95,4.3 v1(17.65,4.3)
SEN_C2_S2: P36.1 U1.11 | length 43.5
  Top Layer w0.15: v1(3,7.8) 3.825,7.8 4.125,7.5 4.125,6.35 4.475,6 v1@4.55,6 ; v1(6.025,11.1) 6.025,11.774 7.576,13.325 14.15,13.325 14.475,13 14.825,13 15.725,12.1 v1(16.1,12.1) ; v1(16.275,3.725) 16.75,3.25 18.975,3.25 21.475,0.75 25.88,0.75 27.15,2.02 U1.11
  Bottom Layer w0.15: v1(4.5,5.975) 5.25,5.975 6.2,6.925 6.2,10.225 6.025,10.4 v1(6.025,11.1) ; v1(16.1,12.1) 16.1,11.485 15.95,11.335 15.95,7.95 16.55,7.35 16.55,6.724 15.925,6.099 15.925,4.075 v1(16.275,3.725)
SWCLK: P3.1 U1.49 | length 3.3
  Top Layer w0.15: U1.49 21.125,12.05 21.475,11.7 21.475,11.15 v1(22,10.625)
  Bottom Layer w0.15: P3.1 v1(22,10.625)
SWDIO: P2.1 U1.46 | length 3.8
  Top Layer w0.15: U1.46 23.15,12.95 23.725,12.375 v1(25,12.375)
  Bottom Layer w0.15: v1(25,12.375) P2.1
U2_VDD: C16.1 R10.1 U7.5 | length 3.8
  Top Layer w0.2: C16.1@4.375,21.525 4.35,21.55 4.35,22.375 4.675,22.7 4.675,23.125 R10.1 ; C16.1@4.425,21.55 4.413,21.538 4.413,20.287 U7.5
UART1_RX_BLE_TX: U1.59 U2.8 | length 11.5
  Top Layer w0.15: U2.8 11.4,11.35 12.275,10.475 12.275,9.625 13.6,8.3 16.075,8.3 17.325,7.05 U1.59
UART1_TX_BLE_RX: U1.58 U2.7 | length 10.5
  Top Layer w0.15: U2.7 12.6,10.294 13.394,9.5 15.9,9.5 16.575,8.825 16.575,8.224 17.249,7.55 U1.58
VIN: P38.1 R7.2 R8.2 U6.4 | length 13.1
  Top Layer w0.2: U6.4@0.975,25.45 U6.4@1.025,25.4 ; v2(1.175,29.475) 1.175,30.013 4.062,32.9 5,32.9 5.475,32.425 8.062,32.425 R8.2
  Layer 3 w0.2: v2(0.8,26.425) 0.8,29.1 v2(1.175,29.475)
  other v2: 0.7,22.2 1.7,22.2 0.8,25.775 0.625,26.1
VINT1: C12.1 U4.12 | length 2
  Top Layer w0.25: U4.12 15.35,25.2 v4(15.775,24.775)
  Bottom Layer w0.25: C12.1@15.35,25.075 15.475,25.075 v4(15.775,24.775)
VINT2: C14.1 U5.12 | length 1.8
  Top Layer w0.25: U5.12 20.25,25.2 v4(20.675,24.775)
  Bottom Layer w0.25: C14.1 20.4,25.05 v4(20.675,24.775)
VM: R9.2 U7.2 | length 1.2
  Top Layer w0.2: R9.2 U7.2
pads on no net: Q4.1 Q4.8 U1.28 U1.37 U1.38 U1.39 U1.40 U1.56 U1.60 U2.1 U2.3 U2.4 U2.5 U2.9 U2.11 U2.12 U3.10 U3.11 U4.6 U4.9 U5.6 U5.9 U7.4

## Polygon pours and split planes (outlines as drawn)
3V3 on Layer 3 "3V3_L03_P003" (solid, remove dead copper, pour order 3): 0,0 0,34.3 34.3,34.3 34.3,0
3V3 on Layer 3 "3V3_L03_P004" (solid, remove dead copper, pour order 4): 36.2,-0.3
GND on Layer 2 "GND_L02_P002" (solid, remove dead copper, pour order 2): 0,0 0,34.3 34.3,34.3 34.3,0

## Keep-outs
Top Layer:
  rectangle: 6.3,0.5 15.3,4.5
Layer 2:
  rectangle: 6.3,0.5 15.3,4.5
Layer 3:
  rectangle: 6.3,0.5 15.3,4.5
Bottom Layer:
  rectangle: 6.3,0.5 15.3,4.5

## Other copper
Top Layer:
  rectangle net BATT+: 0.4,18.325 1.35,19.875
  rectangle net BATT-: 1.75,18.325 2.65,19.875
  rectangle net BATT-: 1.8,18.925 5.9,19.45
  rectangle net VIN: 0.4,25.075 1.3,27.075
  rectangle net GND: 2.525,23.475 3.25,25.525
  rectangle net GND: 2.875,24.175 4.375,24.825
  rectangle net BATT+: 2.45,12.525 4.15,14.975
  rectangle net 3V3: 2.45,9.825 4.15,12.275
  rectangle net GND: 0.653,9.825 2.127,14.975
  region net 3V3: 3.175,10.075
  region: 5.3,8.975
Layer 2:
  rectangle net GND: 18.65,26.625 20.35,28.325
  rectangle net GND: 13.75,26.65 15.45,28.35
Layer 3:
  rectangle net BATT+: 0.4,18.325 1.35,19.875
  rectangle net VIN: 0.4,21.725 2,22.675
  rectangle net VIN: 0.4,21.725 1.125,26.7
  region net BATT+: 3.4,25.825 5.125,25.825 5.675,25.275 5.675,24.525 4.775,24.525 4.775,25 4.7,25.075 3.4,25.075
Bottom Layer:
  rectangle net BATT-: 19.25,32.5 22.25,33.5
  rectangle net BATT+: 11.75,32.5 14.75,33.5
  rectangle net BATT+: 13.775,24.625 14.725,25.375
  rectangle net BATT+: 18.675,24.625 19.625,25.375
  rectangle net BATT-: 4.75,18.8 5.9,22.875
  rectangle net GND: 4.75,14.575 5.9,16.675
  region net GND: 26.775,6.225 26.05,6.225 26.05,4.375 26.775,4.375
  rectangle net 3V3: 27.225,4.375 27.95,6.225
  rectangle net 3V3: 28.625,5.525 30.475,6.275
  rectangle net GND: 28.625,4.325 30.475,5.075
  rectangle net GND: 18.65,26.65 20.35,28.35
  rectangle net GND: 13.75,26.65 15.45,28.35

## Silkscreen, mask and mechanical layers (free items; w line width, h text height)
Bottom Overlay:
  circle w0.2: c8.26,8.26 r3.2
  circle w0.2: c8.262,27.639 r4
  circle w0.2: c25.5,25.5 r4
  lines w0.2: 2.9,14.2 2.9,28.4 6.6,32.1 23,32.1 24.6,30.5 27.8,30.5 30,28.3 30,28.2 30,22.9 31,21.9 31,3.9 30.4,3.3 23.1,3.3 16.7,3.3 15.7,2.3 6.1,2.3 4,4.4 4,13.1 2.9,14.2 ; 13.6,8 13.6,10.3 15.4,10.3 15.4,8 13.6,8
Mechanical 1:
  circle w0.5: c8.262,27.639 r3.1
  circle w0.5: c25.5,25.5 r3.1
  lines w0.5: 0,7.011 ccw(c1,7.011) 0.153,6.48 ccw(c17.1,17.1) 6.48,0.153 ccw(c7.011,1) 7.011,0 15.95,0 ccw(c15.95,0.55) 16.5,0.55 cw(c17.05,0.55) 17.05,1.1 17.15,1.1 cw(c17.15,0.55) 17.7,0.55 ccw(c18.25,0.55) 18.25,0 28.966,0 ccw(c28.966,1) 29.559,0.195 ccw(c17.1,17.1) 34.005,4.641 ccw(c33.2,5.235) 34.2,5.235 34.2,15.95 ccw(c33.65,15.95) 33.65,16.5 cw(c33.65,17.05) 33.1,17.05 33.1,17.15 cw(c33.65,17.15) 33.65,17.7 ccw(c33.65,18.25) 34.2,18.25 34.2,28.966 ccw(c33.2,28.966) 34.005,29.559 ccw(c17.1,17.1) 29.559,34.005 ccw(c28.966,33.2) 28.966,34.2 18.25,34.2 ccw(c18.25,33.65) 17.7,33.65 cw(c17.15,33.65) 17.15,33.1 17.05,33.1 cw(c17.05,33.65) 16.5,33.65 ccw(c15.95,33.65) 15.95,34.2 5.235,34.2 ccw(c5.235,33.2) 4.642,34.005 ccw(c17.1,17.1) 0.195,29.559 ccw(c1,28.966) 0,28.966 0,18.25 ccw(c0.55,18.25) 0.55,17.7 cw(c0.55,17.15) 1.1,17.15 1.1,17.05 cw(c0.55,17.05) 0.55,16.5 ccw(c0.55,15.95) 0,15.95 0,7.011 ; 7.251,15.779 ccw(c7.751,15.779) 7.751,15.279 16.172,15.279 cw(c16.172,14.779) 16.358,15.243 ccw(c17.1,17.1) 17.843,15.243 cw(c18.028,14.779) 18.028,15.279 20.1,15.279 ccw(c20.1,15.779) 20.6,15.779 20.6,22.152 ccw(c20.1,22.152) 20.1,22.652 11.6,22.652 cw(c11.6,23.152) 11.1,23.152 ccw(c10.6,23.152) 10.6,23.652 7.951,23.652 ccw(c7.951,23.152) 7.451,23.152 7.451,20.545 cw(c6.951,20.545) 7.351,20.245 ccw(c7.751,19.945) 7.251,19.945 7.251,15.779
Assembly Notes:
  lines w0.2: -6.6,19.1 0.8,19.1 0.8,35.6 ; -6.6,20.8 1.2,20.8 ; -6.6,22.2 1.2,22.2 1.2,37.7 ; -4.4,1.4 10.6,1.4 10.6,-3.3 ; -4.4,7.2 0.9,7.2 ; -4.4,8.4 0.9,8.4 ; -4.4,9.6 0.9,9.6 ; -4.4,10.8 0.9,10.8 ; -3.8,0 0.5,0 ; -3.6,33 14,33 14,38.9 ; 0,-3.8 0,0.5 ; 2.2,19.1 2.2,37.7 ; 2.5,-3.2 2.5,6.6 ; 11.8,-3.3 11.8,1.4 ; 12.5,33 12.5,38.9 ; 13,-3.3 13,1.4 ; 17.3,-3.8 17.3,2.6 ; 18.5,-3.8 18.5,2.6 40.6,2.6 ; 20,33 20,38.9 ; 21.5,33 21.5,38.9 ; 23.6,33.3 23.6,38.9 ; 24.8,33.3 24.8,38.9 ; 26,33.3 26,38.9 ; 27.2,38.9 27.2,33.3 31.4,33.3 ; 31.8,38.9 31.8,24.4 36.5,24.4 ; 33.3,25 39,25 ; 33.3,26.2 39,26.2 ; 33.3,27.4 39,27.4 ; 33.3,28.6 39,28.6 ; 33.3,38.9 33.3,23.8 39,23.8 ; 33.7,33.3 39,33.3 ; 35.2,23.2 35.5,23.5 ; 35.5,22.5 35.5,23.5 ; 35.5,23.8 35.5,24.4 ; 35.8,23.2 35.5,23.5 ; 35.5,23.5 35.5,23.5
  text "33.3" at 33.127,37.366 h1 r90
  text "20.0" at 12.327,37.355 h1 r90
  text "21.5" at 13.827,37.355 h1 r90
  text "20.0" at 19.827,37.355 h1 r90
  text "21.5" at 21.327,37.355 h1 r90
  text "23.6" at 23.427,37.357 h1 r90
  text "24.8" at 24.627,37.361 h1 r90
  text "26.0" at 25.827,37.363 h1 r90
  text "27.2" at 27.027,37.364 h1 r90
  text "31.8" at 31.627,37.352 h1 r90
  text "1.2" at 1.027,36.618 h1 r90
  text "2.2" at 2.027,36.61 h1 r90
  text "0.8" at 0.627,34.261 h1 r90
  text "33.3" at 37.461,33.473 h1
  text "33.0" at -3.737,33.173 h1
  text "28.6" at 37.452,28.773 h1
  text "27.4" at 37.452,27.573 h1
  text "26.2" at 36.676,26.373 h1
  text "25.0" at 37.461,25.173 h1
  text "23.8" at 36.676,23.973 h1
  text "22.2" at -6.736,22.373 h1
  text "0.6" at 35.667,22.173 h1
  text "20.8" at -6.739,20.973 h1
  text "19.1" at -6.831,19.273 h1
  text "10.8" at -4.614,10.973 h1
  text "9.6" at -4.593,9.773 h1
  text "8.4" at -4.593,8.573 h1
  text "7.2" at -4.58,7.373 h1
  text "2.6" at 38.779,2.773 h1
  text "1.4" at -4.814,1.573 h1
  text "0.0" at -4.38,-0.827 h1
  text "2.5" at 2.327,-3.297 h1 r90
  text "10.6" at 10.514,-3.419 h1 r90
  text "11.8" at 11.627,-3.414 h1 r90
  text "13.0" at 12.827,-3.419 h1 r90
  text "17.3" at 17.127,-3.915 h1 r90
  text "18.5" at 18.327,-3.921 h1 r90
  text "0.0" at -0.58,-4.452 h1

## Dimensions
0.9,7.2 to 2.5,6.6 on Assembly Notes
2.5,6.6 to 0.9,7.2 on Assembly Notes